# Altium PCB pix v2.4.8.PcbDoc (part 1 of 3)
Units mil, origin at the board's own origin, x right, y up, seen from the top; angles counter-clockwise.
Board outline 2756 x 1595 mil, 4 copper layers (Top, MidLayer1, MidLayer2, Bottom), stack 50.397 mil thick; 154 components, 289 nets, 731 pads, 438 vias.
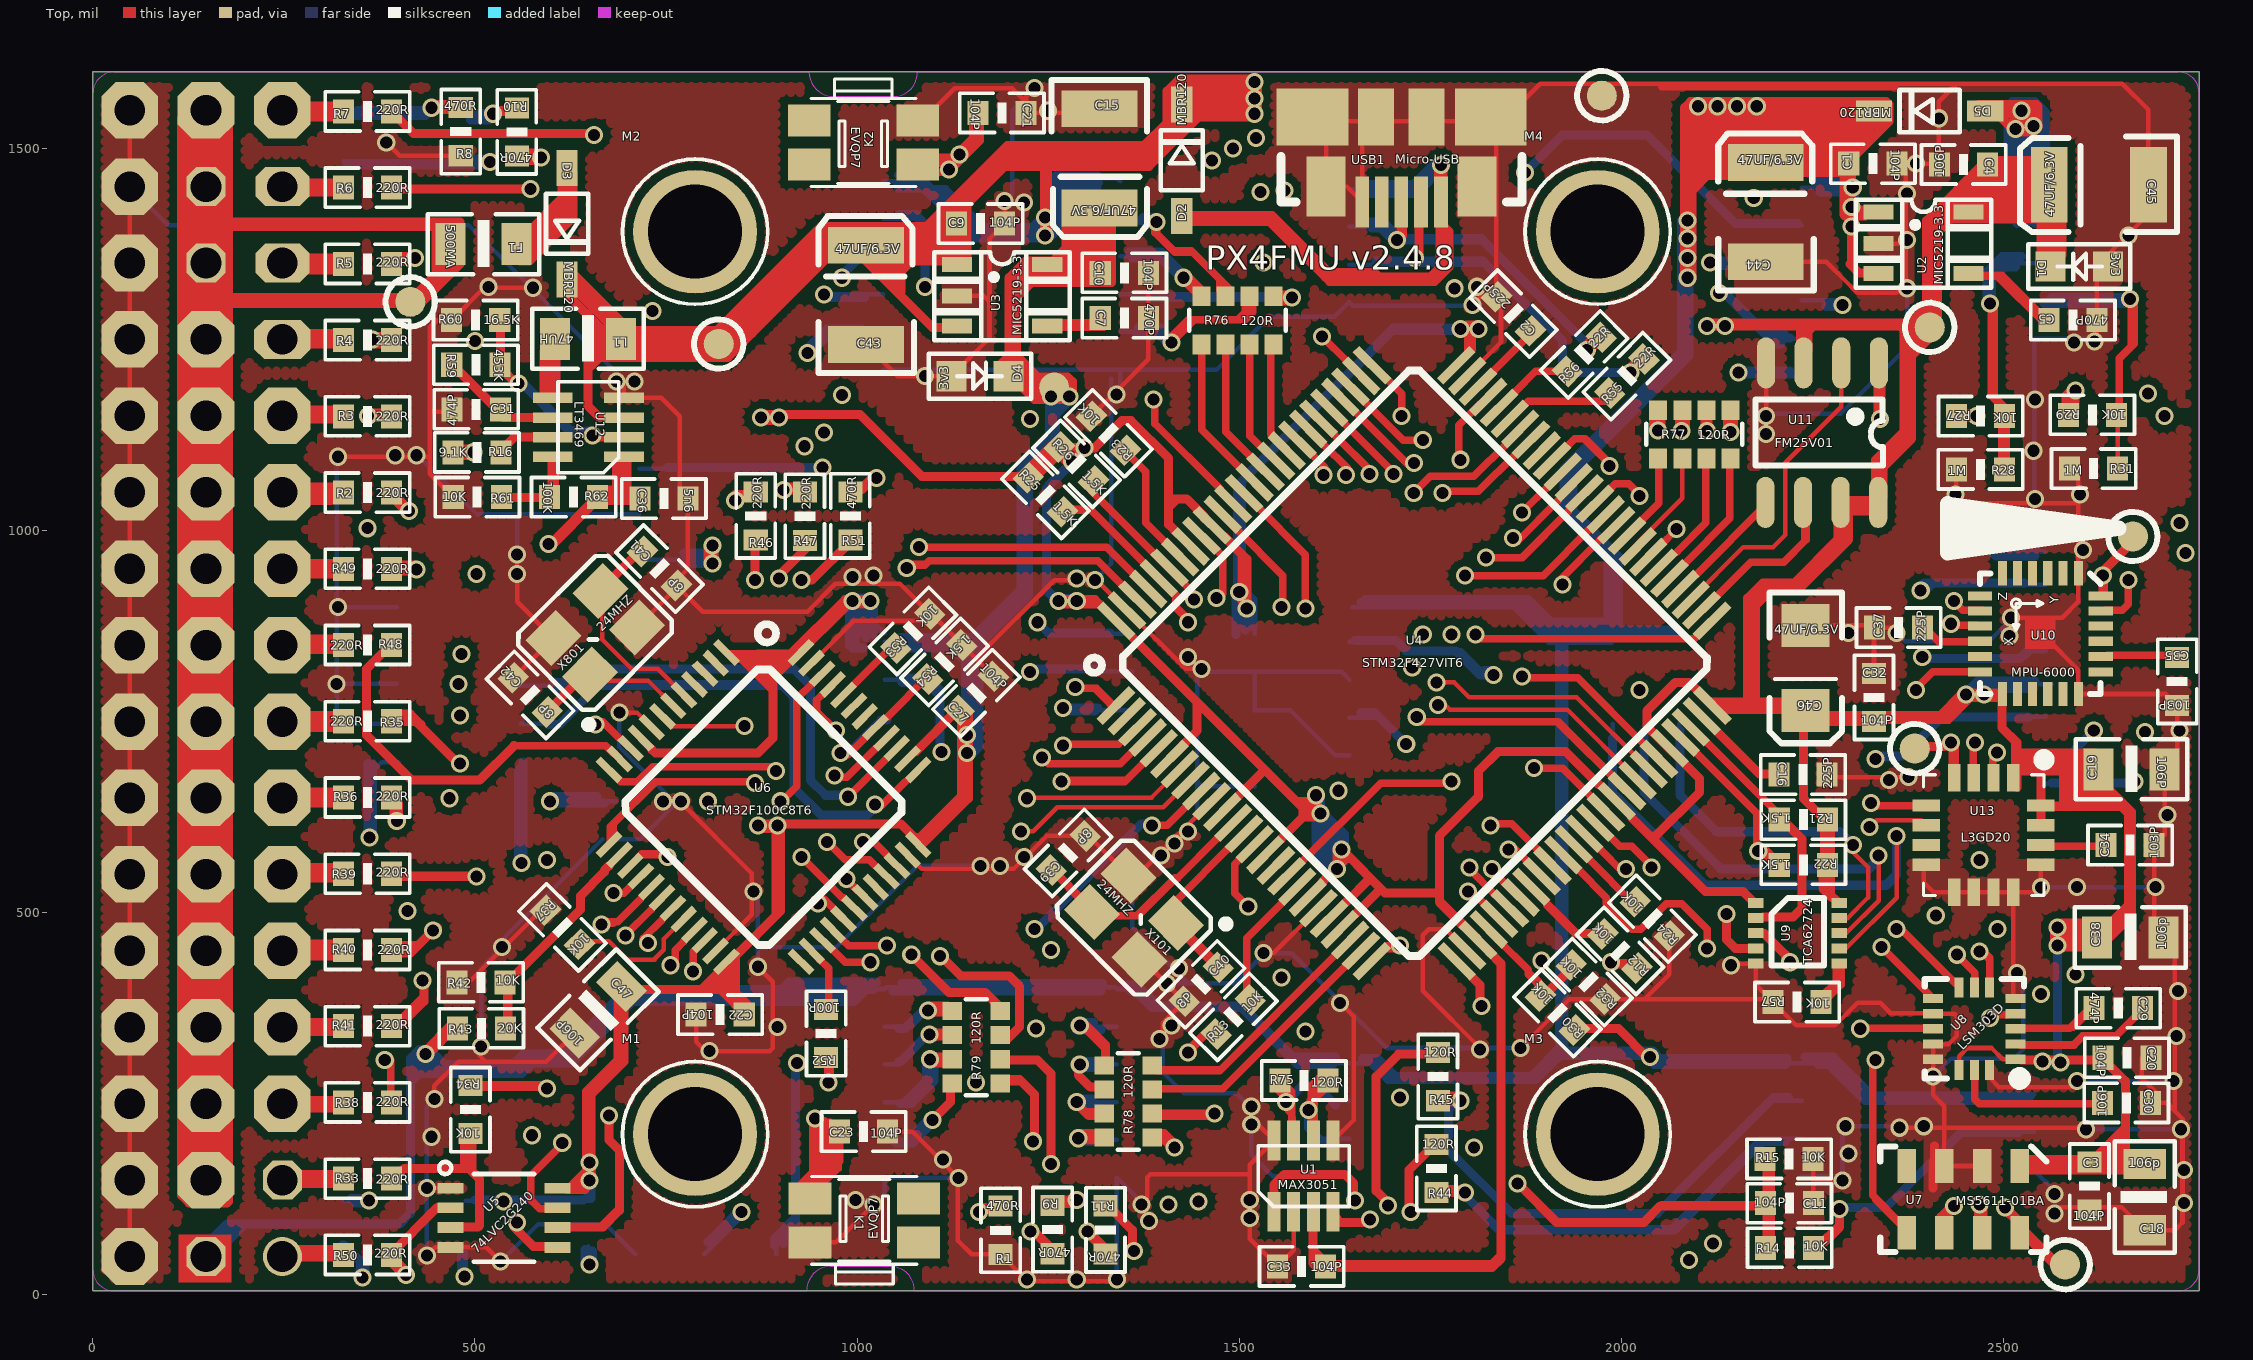
[diagram p0: Top view]
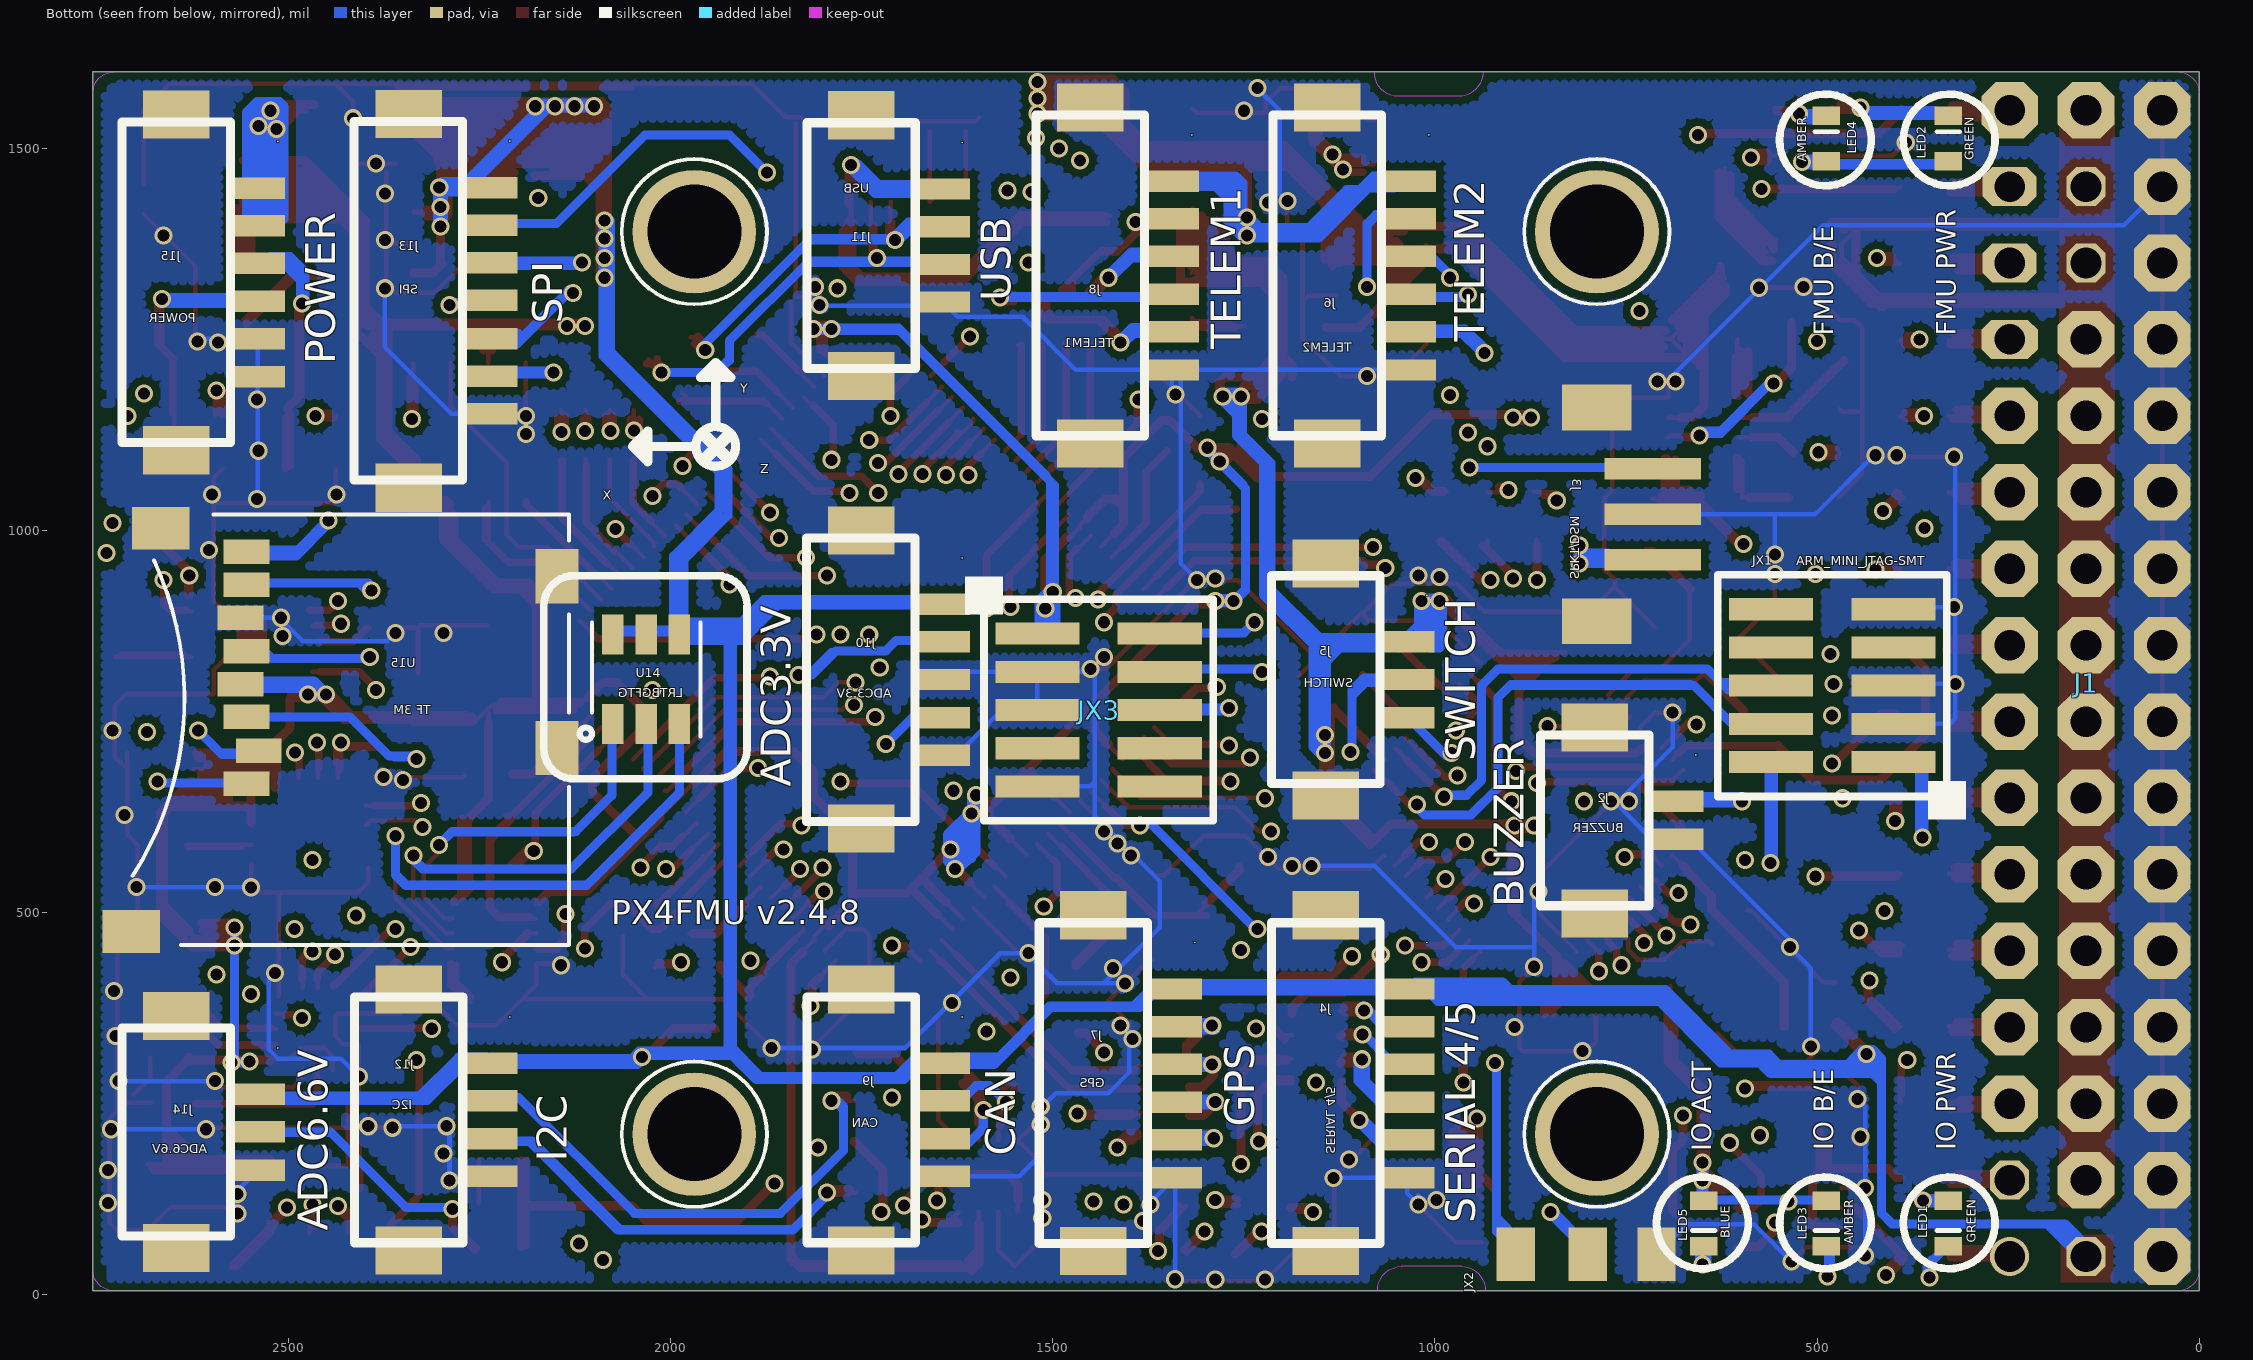
[diagram p1: Bottom view, seen from below]
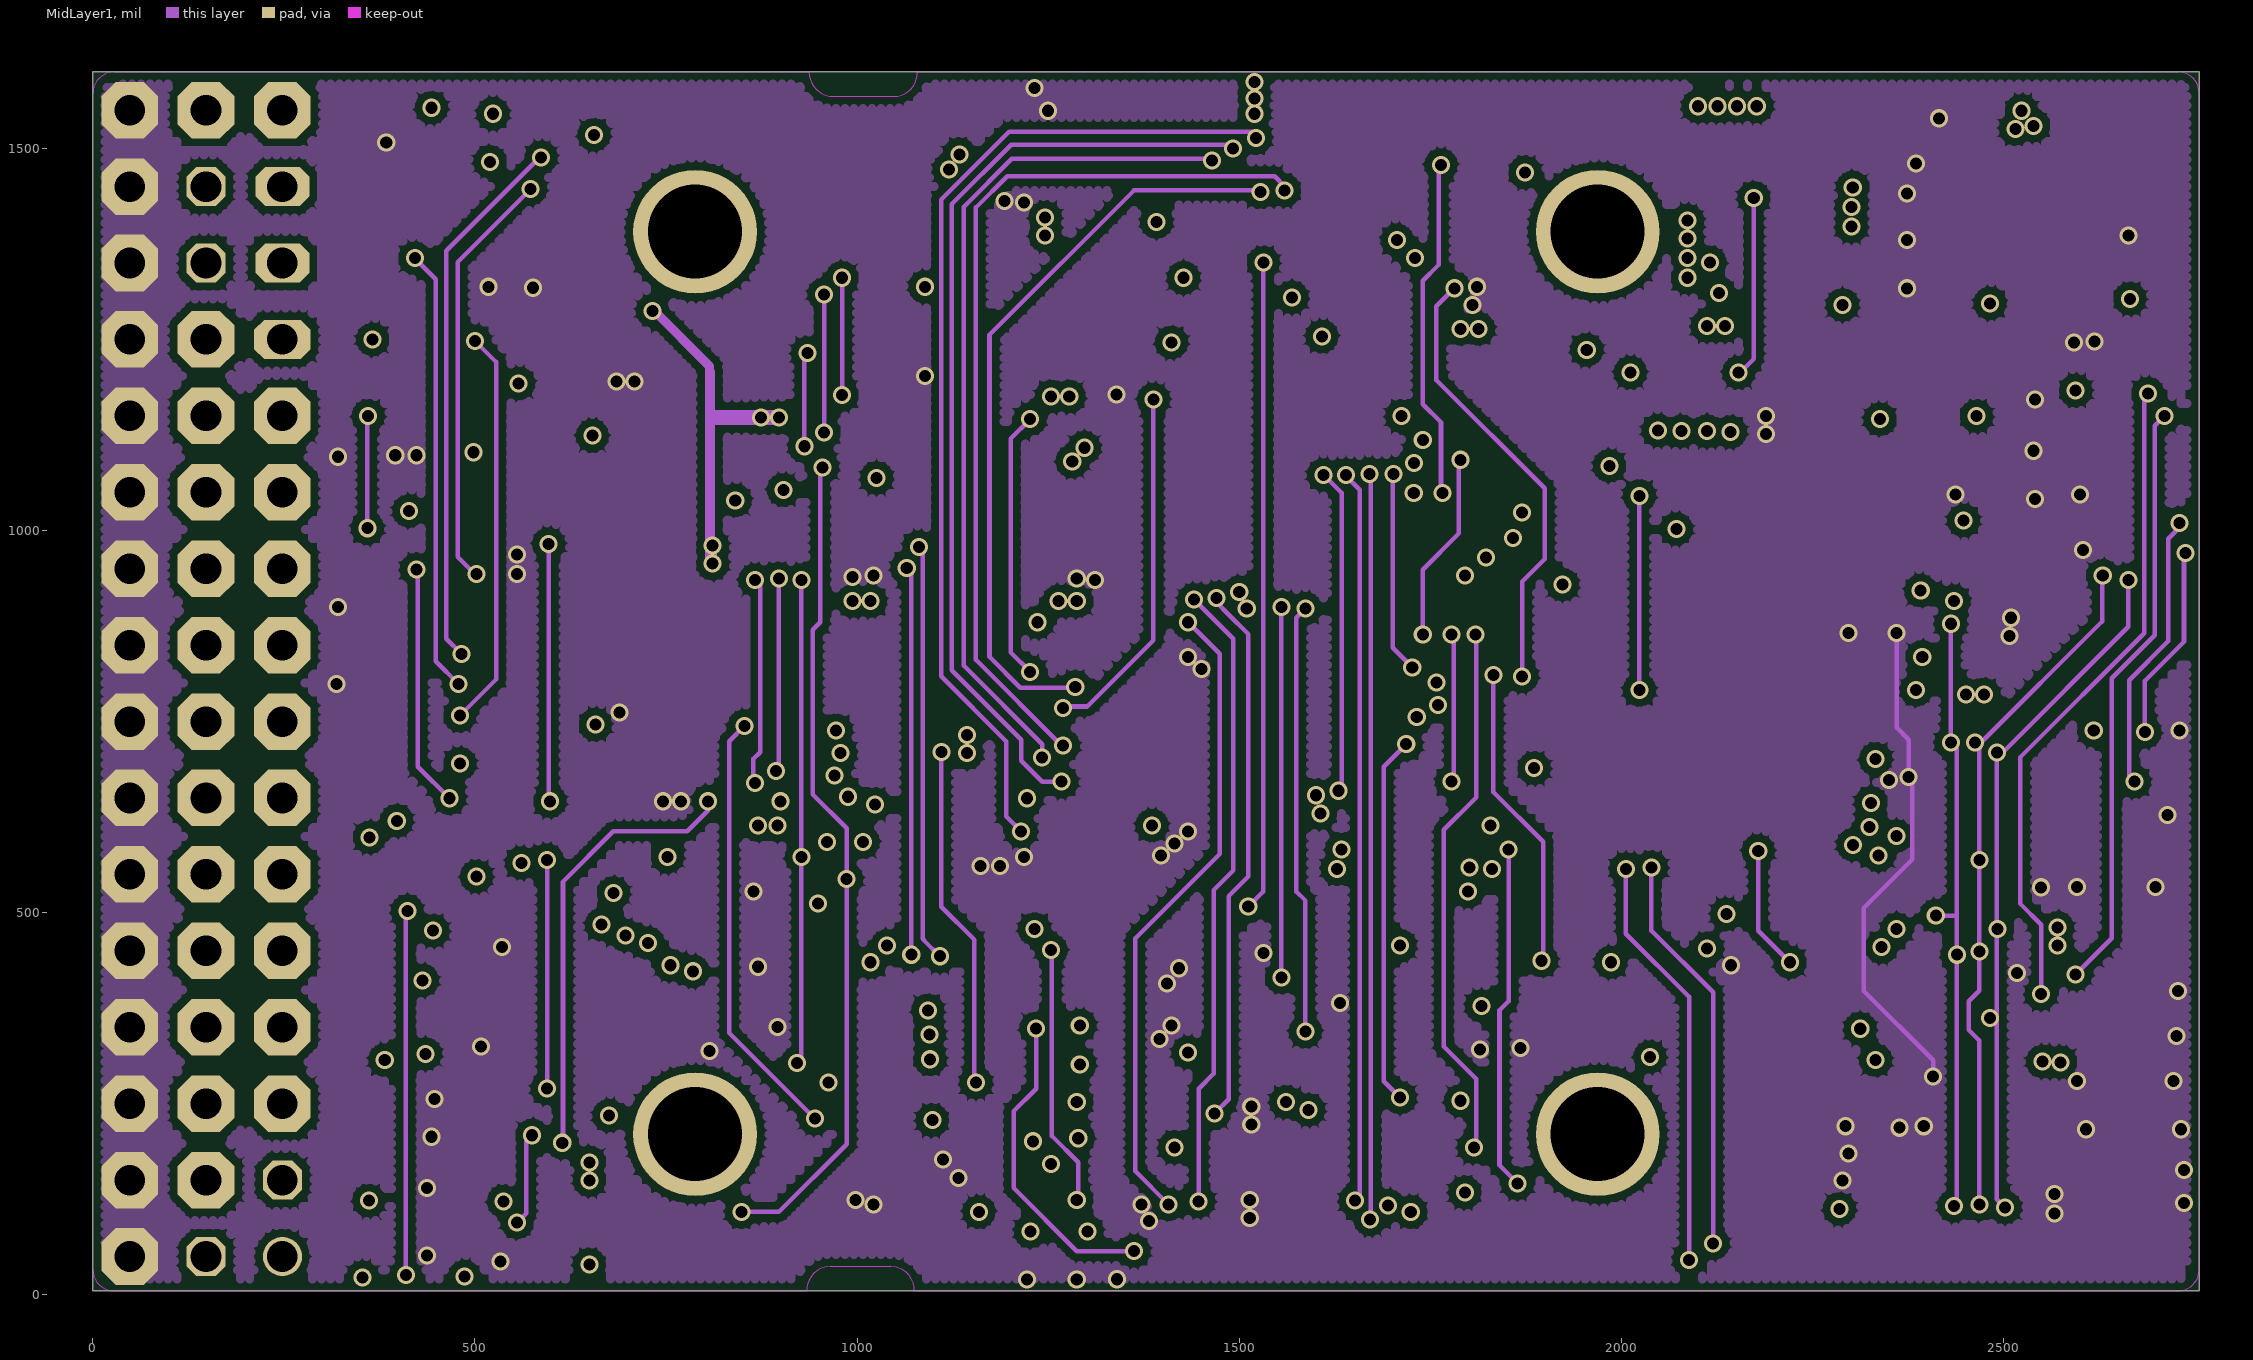
[diagram p2: MidLayer1]
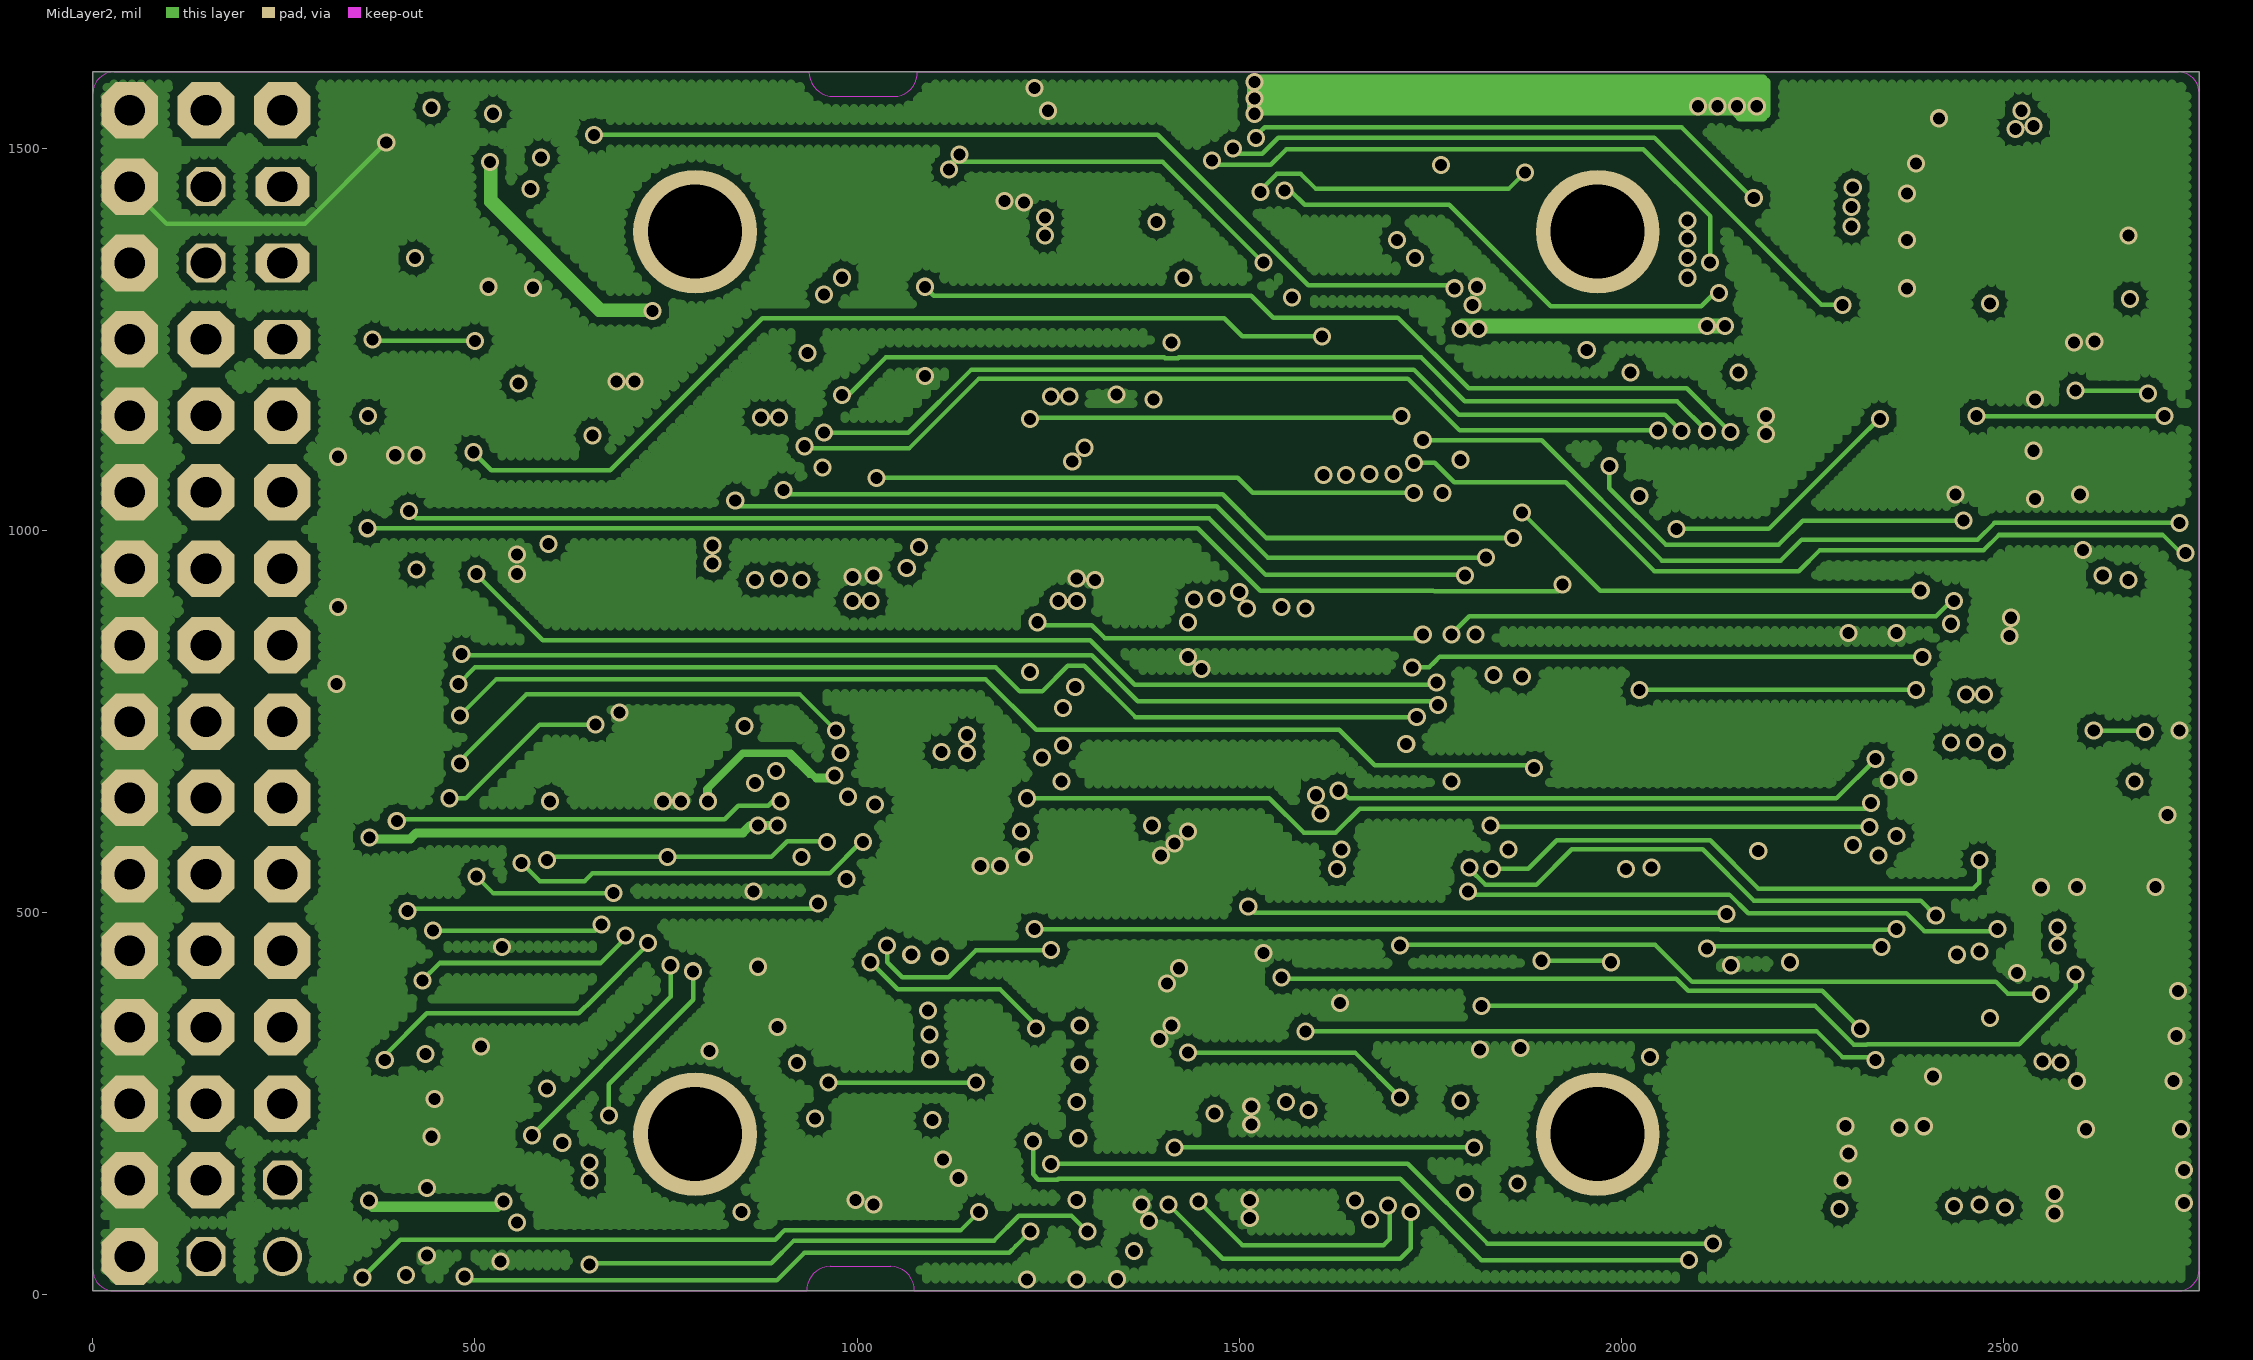
[diagram p3: MidLayer2]

## Layer stack, top to bottom
Top Solder: solder mask 0.4, Solder Resist, Dk 3.5
Top: signal copper 1.378
Dielectric1: core 19.685, FR-4, Dk 4.8
MidLayer1: signal copper 1.378
Dielectric2: prepreg 12.6, FR-4, Dk 4.8
MidLayer2: signal copper 1.378
Dielectric3: core 12.6, FR-4, Dk 4.8
Bottom: signal copper 1.378
Bottom Solder: solder mask 0.4, Solder Resist, Dk 3.5

## Board outline
0,5 2756,5 2756,1600 0,1600

## Design rules (kind name [scope] priority, off if disabled: settings)
Clearance [All] p1: gap=9.84 ignorepadtopadclearanceinfootprint=FALSE
FanoutControl Fanout_LCC [All] p1 off: bgadir=Out bgaviamode=Centered fanoutstyle=Auto fanoutdirection=Alternating viagrid=1 // Protel DXP Scope 1 Expression Was: IsLCC   Fanout_LCC (Default Rule)
FanoutControl Fanout_BGA [All] p2 off: bgadir=Out bgaviamode=Centered fanoutstyle=Auto fanoutdirection=Alternating viagrid=1 // Protel DXP Scope 1 Expression Was: IsBGA   Fanout_BGA (Default Rule)
FanoutControl Fanout_SOIC [All] p3 off: bgadir=Out bgaviamode=Centered fanoutstyle=Auto fanoutdirection=Alternating viagrid=1 // Protel DXP Scope 1 Expression Was: IsSOIC   Fanout_SOIC (Default Rule)
FanoutControl Fanout_Default [All] p4: bgadir=Out bgaviamode=Centered fanoutstyle=Auto fanoutdirection=Alternating viagrid=1 // Fanout_Default (Default Rule)
FanoutControl Fanout_Small [All] p5 off: bgadir=Out bgaviamode=Centered fanoutstyle=Auto fanoutdirection=Alternating viagrid=1 // Protel DXP Scope 1 Expression Was: (CompPinCount < 5)   Fanout_Small (Default Rule)
HoleSize [All] p1: absolutevalues=TRUE maxlimit=100000 minlimit=7.87 maxpercent=80.000 minpercent=20.000
PasteMaskExpansion [All] p1: expansion=1
PlaneConnect [All] p1: planeconnectstyle=NoConnect reliefexpansion=20 reliefentries=4 reliefconductorwidth=10 reliefairgap=10
PolygonConnect 多边形连接.... [All] p1: connectstyle=NoConnect reliefconductorwidth=10 reliefentries=4 polygonreliefangle="45 Angle" airgapwidth=10
RoutingLayers [All] p1: top layer_v5=FALSE mid layer 1_v5=FALSE mid layer 2_v5=FALSE bottom layer_v5=FALSE
RoutingVias [All] p1: holewidth=15.75 width=23.62 viastyle="Through Hole" minholewidth=15.75 minwidth=23.62 maxholewidth=15.75 maxwidth=23.62
SilkToSolderMaskClearance SilkscreenOverComponentPads [All] p1: minsilkscreentomaskgap=10 clearancetoexposedcopper=TRUE
SolderMaskExpansion [All] p1: expansion=1 istentingtop=FALSE
Width [All] p1: maxlimit=5.91 minlimit=5.91 preferedwidth=5.91
20 further rules are at their usual default settings.

## Components (designator, comment, footprint, x,y, rotation, side; value= is the part's Value field where it differs from the comment)
C1 "104P" 0603 2360.55,1479.92 r180 top
C2 "225P" 0603 1836.62,1305.96 r315 top
C3 "104P" 0603 2612.44,110.51 r90 top
C4 "106P" 0603 2416.3,1478.94 r0 top
C5 "470P" 0603 2559.33,1275.35 r0 top
C7 "470P" 0603 1318.11,1277.83 r0 top
C9 "104P" 0603 1130.04,1401.57 r0 top
C10 "104P" 0603 1318.11,1337.17 r0 top
C11 "104P" 0603 2251.34,119.8 r180 top
C15 "47UF/6.3V" C-3528 1318.62,1491.34 r90 top
C16 "225P" 0603 2269.19,680.53 r180 top
C18 "106p" 0805 2684.8,170.98 r270 top
C19 "106P" 0805 2710.75,687.48 r180 top
C20 "104P" 0603 2630.08,310.04 r0 top
C21 "104P" 0603 1220.98,1546.42 r180 top
C22 "104P" 0603 789.29,366.53 r0 top
C23 "104P" 0603 1039.96,213.5 r180 top
C27 "104P" 0603 1133.81,764.77 r45 top
C29 "474P" 0603 2618.7,374.92 r0 top
C30 "106P" 0603 2629.33,251.06 r0 top
C31 "474P" 0603 470.12,1158.54 r0 top
C32 "104P" 0603 2330.59,813 r270 top
C33 "104P" 0603 1550.12,37.05 r0 top
C34 "103P" 0603 2697.17,588.31 r180 top
C35 "103P" 0603 2727.28,771.06 r90 top
C36 "5n6" 0603 778.62,1041.69 r180 top
C37 "225P" 0603 2394.29,872.95 r180 top
C38 "106p" 0805 2709.25,467.44 r180 top
C39 "8P" 0603 1253.91,555.78 r45 top
C40 "8P" 0603 1472.47,428.47 r225 top
C41 "8P" 0603 719.16,972.47 r315 top
C42 "8P" 0603 549.87,807.12 r315 top
C43 "47UF/6.3V" C-3528 1010.12,1303.94 r270 top
C44 "47UF/6.3V" C-3528 2187.28,1412.2 r270 top
C45 "47UF/6.3V" C-3528 2629.13,1451.06 r0 top
C46 "47UF/6.3V" C-3216 2240.95,808.78 r180 top
C47 "106P" 0805 630.47,342.26 r45 top
D1 "3v3" SOD-323 2603.11,1347.4 r0 top
D2 "MBR120" SOD-123 1426.57,1486.3 r90 top
D3 "MBR120" SOD-123 618.7,1399.53 r270 top
D4 "3v3" SOD-323 1156.73,1199.88 r180 top
D5 "MBR120" SOD-123 2401.5,1550.59 r180 top
F1 "500MA" 0805D 511.22,1374.65 r180 top
J1 "" 3X16RA 148,800 r0 bottom locked
J2 "BUZZER" DF13C-2P-1.25V 720,621 r270 bottom locked
J3 "SPKT/DSM" JST-ZH-SMT-VERTICAL 784,1021 r90 bottom locked
J4 "SERIAL 4/5" DF13C-6P-1.25V 1072,277 r270 bottom locked
J5 "SWITCH" DF13C-3P-1.25V 1072,805 r270 bottom locked
J6 "TELEM2" DF13C-6P-1.25V 1070,1334 r270 bottom locked
J7 "GPS" DF13C-6P-1.25V 1376,277 r270 bottom locked
J8 "TELEM1" DF13C-6P-1.25V 1380,1334 r270 bottom locked
J9 "CAN" DF13C-4P-1.25V 1680,229 r270 bottom locked
J10 "ADC3.3V" DF13C-5P-1.25V 1680,805 r270 bottom locked
J11 "USB" DF13C-4P-1.25V 1680,1373 r270 bottom locked
J12 "I2C" DF13C-4P-1.25V 2272,229 r270 bottom locked
J13 "SPI" DF13C-7P-1.25V 2272,1301 r270 bottom locked
J14 "ADC6.6V" DF13C-3P-1.25V 2576,213 r270 bottom locked
J15 "POWER" DF13C-6P-1.25V 2576,1325 r270 bottom locked
JX1 "ARM_MINI_JTAG-SMT" FTSH-105-01-XXX-DV-K 480,797 r90 bottom locked
JX2 "" HEADER_3X01_SMD_H_BOARD_EDGE_SHORT 800,53 r180 bottom locked
JX3 "ARM_MINI_JTAG-SMT" FTSH-105-01-XXX-DV-K 1440,765 r270 bottom locked
K1 "EVQP7" EVQP7J01K 1007.13,101.97 r180 top locked
K2 "EVQP7" EVQP7J01K 1010.5,1503.03 r0 top locked
L1 "47UH" 0805D 647.91,1250.75 r180 top
LED1 "GREEN" 0603-LED 328,93 r90 bottom locked
LED2 "GREEN" 0603-LED 328,1513 r270 bottom locked
LED3 "AMBER" 0603-LED 488,93 r90 bottom locked
LED4 "AMBER" 0603-LED 488,1513 r270 bottom locked
LED5 "BLUE" 0603-LED 648,93 r90 bottom locked
M1 "" MOUNT-HOLE3.1 788,210 r0 top locked
M2 "" MOUNT-HOLE3.1 788,1391 r0 top locked
M3 "" MOUNT-HOLE3.1 1969,210 r0 top locked
M4 "" MOUNT-HOLE3.1 1969,1391 r0 top locked
R1 "470R" 0603 1187.72,115.87 r270 top
R2 "220R" 0603 390.83,1049.62 r180 top
R3 "220R" 0603 390.83,1149.37 r180 top
R4 "220R" 0603 390.83,1249.13 r180 top
R5 "220R" 0603 390.83,1348.88 r180 top
R6 "220R" 0603 390.83,1448.63 r180 top
R7 "220R" 0603 390.83,1548.38 r180 top
R8 "470R" 0603 481.38,1553.31 r270 top
R9 "470R" 0603 1255.75,53.58 r90 top
R10 "470R" 0603 554.72,1490.04 r90 top
R11 "470R" 0603 1325.04,53.43 r90 top
R12 "10K" 0603 1975.96,472.07 r315 top
R13 "10K" 0603 1514.58,385.75 r225 top
R14 "10K" 0603 2251.65,61.35 r180 top
R15 "10K" 0603 2250.9,177.73 r180 top
R16 "9.1K" 0603 470.94,1102.24 r0 top
R21 "1.5K" 0603 2206.57,621.57 r0 top
R22 "1.5K" 0603 2206.57,562.52 r0 top
R23 "10K" 0603 1306.56,1149.49 r315 top
R24 "10K" 0603 2062.78,469.7 r135 top
R25 "1.5K" 0603 1268.66,1024.34 r135 top
R26 "1.5K" 0603 1309.42,1064.76 r135 top
R27 "10K" 0603 2438.5,1149.72 r0 top
R28 "1M" 0603 2501.46,1080 r180 top
R29 "10K" 0603 2584.92,1151.34 r0 top
R30 "10K" 0603 1894.07,390.86 r315 top
R31 "1M" 0603 2649.33,1080.95 r180 top
R32 "10K" 0603 1934.5,431.43 r315 top
R33 "220R" 0603 390.83,151.84 r180 top
R34 "10K" 0603 493.98,273.74 r270 top
R35 "220R" 0603 390.83,750.36 r180 top
R36 "220R" 0603 390.83,650.61 r180 top
R37 "10K" 0603 592.12,503.05 r315 top
R38 "220R" 0603 390.83,251.59 r180 top
R39 "220R" 0603 390.83,550.85 r180 top
R40 "220R" 0603 390.83,451.1 r180 top
R41 "220R" 0603 390.83,351.35 r180 top
R42 "10K" 0603 539.34,408.75 r180 top
R43 "20K" 0603 476.82,348.62 r0 top
R44 "120R" 0603 1757.99,133.74 r90 top
R45 "120R" 0603 1759.96,253.82 r90 top
R46 "220R" 0603 867.38,1050.61 r270 top
R47 "220R" 0603 931.69,1050.12 r270 top
R48 "220R" 0603 390.83,850.11 r180 top
R49 "220R" 0603 390.83,949.87 r180 top
R50 "220R" 0603 390.83,52.09 r180 top
R51 "470R" 0603 991.06,1050.59 r270 top
R52 "100R" 0603 959.49,373.3 r270 top
R53 "10K" 0603 1050.66,846.29 r45 top
R54 "1.5K" 0603 1092.24,805.67 r45 top
R55 "22R" 0603 1984.98,1179.83 r45 top
R56 "22R" 0603 1929.11,1208.15 r45 top
R57 "10K" 0603 2261.46,382.95 r180 top
R59 "453K" 0603 469.57,1216.89 r0 top
R60 "16.5K" 0603 532.4,1275.24 r180 top
R61 "10K" 0603 471.54,1043.66 r0 top
R62 "100K" 0603 597.52,1043.66 r0 top
R75 "120R" 0603 1616.18,280.28 r180 top
R76 "120R" TC164 1497.66,1274.88 r0 top
R77 "120R" TC164 2095.48,1125.66 r0 top
R78 "120R" TC164 1354.66,252.96 r90 top
R79 "120R" TC164 1155.84,323.83 r90 top
U1 "MAX3051" SOT23-8#1 1584,154.91 r0 top
U2 "MIC5219-3.3" SOT-23-5 2396.66,1374.9 r0 top
U3 "MIC5219-3.3" SOT-23-5 1191.03,1306.39 r0 top
U4 "STM32F427VIT6" TQFP100 1728.93,826 r45 top locked
U5 "74LVC2G240" TSSOP8_SOT505-2 537.76,100.91 r270 top
U6 "STM32F100C8T6" TQFP48 877.68,638.54 r225 top locked
U7 "MS5611-01BA" MS5611-01BA 2447.09,125.12 r270 top
U8 "LSM303D" LGA-16L 2461.93,348.03 r180 top
U9 "TCA62724" SON10 2233.74,464.25 r180 top
U10 "MPU-6000" QFN-24 2548.01,865.04 r270 top
U11 "FM25V01" sop-8-2 2258.31,1127.46 r270 top
U12 "LT3469" SOT23-8#2 644.72,1137.83 r180 top
U13 "L3GD20" L3G4200DH-MAN 2473.9,601.61 r270 top
U14 "LRTBGFTG" 6-PLCC 2032,805 r90 bottom locked
U15 "TF 3M" MICROSD 2448,745 r90 bottom locked
USB1 "Micro-USB" MOLEX-47346-0001 1712,1541 r270 top locked
X101 "24MHZ" OSCILLATOR-3.2X2.5 1362.7,493.52 r135 top
X801 "24MHZ" OSCILLATOR-3.2X2.5 657.21,865.72 r45 top
? "" OSHW-LOGO-S 2112.64,291.77 r0 top

## Footprints (in the part's own frame and the unit in brackets; to place one, negate y for a bottom-side part, rotate by r counter-clockwise, add the part's x,y. Pads: shape width x height; smd on the part's side, far side on the other; paste and mask are expansions set on the pad)
3X16RA [mil]
  round 51.18 hole 40: 1(100,750)
  oct 51.18x51.18 hole 40: 2(0,750) 4(100,650) 41(0,-550) 44(0,-650)
  oct 74x74 hole 40: 3(-100,750) 5(0,650) 6(-100,650) 7(100,550) 8(0,550) 9(-100,550) 10(100,450) 11(0,450) 12(-100,450) 13(100,350) 14(0,350) 15(-100,350) 16(100,250) 17(0,250) 18(-100,250) 19(100,150) 20(0,150) 21(-100,150) 22(100,50) 23(0,50) 24(-100,50) 25(100,-50) 26(0,-50) 27(-100,-50) 28(100,-150) 29(0,-150) 30(-100,-150) 31(100,-250) 32(0,-250) 33(-100,-250) 34(100,-350) 35(0,-350) 36(-100,-350) 38(0,-450) 39(-100,-450) 42(-100,-550) 45(-100,-650) 46(100,-750) 47(0,-750) 48(-100,-750)
  oct 74x51.18 hole 40: 37(100,-450)
  oct 70.87x51.18 hole 40: 40(100,-550) 43(100,-650)
6-PLCC [mil]
  rect 52x28 smd: A1(59,44) A2(59,0) A3(59,-43.31) C1(-58.07,44) C2(-58.07,0) C3(-58.07,-43.31)
  silkscreen extent -79,-71 75,87
0603 [mm]
  rect 0.7x0.8 smd: 1(0,0) 2(1.6,0)
  silkscreen extent -0.6,-0.65 2.2,0.65
0603-LED [mil]
  rect 24x36 smd: A(30,0) C(-29.53,0)
  silkscreen extent -9,-15 -9,15
0805 [mm]
  rect 1x1.4 smd: 1(0,0) 2(2.2,0)
  silkscreen extent -0.75,-1 2.95,1
0805D [mm]
  rect 1x1.4 smd: 1(-1.1,0) 2(1.1,0)
  silkscreen extent -1.85,-1 1.85,1
C-3216 [mil]
  rect 63x56 smd: 1(0,44.19) 2(0,-66.93)
  silkscreen extent -48,-110 47,87
C-3528 [mil]
  rect 48x99 smd: 1(-69.41,1.5) 2(60.55,1.5)
  silkscreen extent -107,-61 98,64
DF13C-2P-1.25V [mil]
  rect 28x71 smd: 1(-24.61,36) 2(25,36)
  rect 63x87 smd: M$0(122,-70.87) M$1(-121.06,-70.87)
  silkscreen extent -111,-142 112,0
DF13C-3P-1.25V [mil]
  rect 28x71 smd: 1(-49.21,36) 2(0,36) 3(50,36)
  rect 63x87 smd: M$0(152,-70.87) M$1(-151.57,-70.87)
  silkscreen extent -136,-142 136,0
DF13C-4P-1.25V [mil]
  rect 28x71 smd: 1(-73.82,36) 2(-24.61,36) 3(25,36) 4(74,36)
  rect 63x87 smd: M$0(171,-70.87) M$1(-170.28,-70.87)
  silkscreen extent -160,-142 161,0
DF13C-5P-1.25V [mil]
  rect 28x71 smd: 1(-98.43,36) 2(-49.21,36) 3(0,36) 4(50,36) 5(99,36)
  rect 63x87 smd: M$0(195,-70.87) M$1(-194.88,-70.87)
  silkscreen extent -185,-142 186,0
DF13C-6P-1.25V [mil]
  rect 28x71 smd: 1(-123.03,36) 2(-73.82,36) 3(-24.61,36) 4(25,36) 5(74,36) 6(124,36)
  rect 63x87 smd: M$0(220,-70.87) M$1(-219.49,-70.87)
  silkscreen extent -210,-142 210,0
DF13C-7P-1.25V [mil]
  rect 28x71 smd: 1(-147.64,36) 2(-98.43,36) 3(-49.21,36) 4(0,36) 5(50,36) 6(99,36) 7(148,36)
  rect 63x87 smd: M$0(245,-70.87) M$1(-244.09,-70.87)
  silkscreen extent -234,-142 235,0
EVQP7J01K [mil]
  rect 56x42 smd: 1(-73.13,33.59) 2(-73.13,-23.95) 3(68.73,-23.95) 7(68.73,33.59)
  silkscreen extent -71,-53 67,88
FTSH-105-01-XXX-DV-K [mil]
  rect 29x110 smd: 1(-100,-80) 2(-100,80) 3(-50,-80) 4(-50,80) 5(0,-80) 6(0,80) 7(50,-80) 8(50,80) 9(100,-80) 10(100,80)
  silkscreen extent -175,-175 145,150
HEADER_3X01_SMD_H_BOARD_EDGE_SHORT [mil]
  rect 50x70 smd: 1(-94.09,0) 2(0,0) 3(90.16,0)
JST-ZH-SMT-VERTICAL [mil]
  rect 28x126 smd: P$1(-59.06,-68.9) P$2(0,-68.9) P$3(60,-68.9)
  rect 60x91 smd: P$4(140,4) P$5(-139.76,4)
L3G4200DH-MAN [mil]
  rect 36x16 smd: 1(-74.8,39) 2(-74.8,13) 3(-74.8,-12.8) 4(-74.8,-38.39) 9(75,-38.39) 10(75,-12.8) 11(75,13) 12(75,39)
  rect 16x36 smd: 5(-38.39,-74.8) 6(-12.8,-74.8) 7(13,-74.8) 8(39,-74.8) 13(39,75) 14(13,75) 15(-12.8,75) 16(-38.39,75)
  silkscreen extent -102,-79 79,83
LGA-16L [mil]
  rect 26x12 smd: 1(-53.94,40) 2(-53.94,20) 3(-53.94,0) 4(-53.94,-19.68) 5(-53.94,-39.37) 9(54,-39.37) 10(54,-19.68) 11(54,0) 12(54,20) 13(54,40)
  rect 12x26 smd: 6(-19.68,-53.94) 7(0,-53.94) 8(20,-53.94) 14(20,54) 15(0,54) 16(-19.68,54)
  silkscreen extent -65,-65 65,70
MICROSD [mil]
  rect 32x60 smd: 1(-76.38,107) 2(-33.07,91) 3(11,107) 4(54,115) 5(97,107) 6(141,115) 7(184,107) 8(227,107)
  rect 56x75 smd: NC(-269.68,258) NC3(258,219)
  rect 71x56 smd: NC1(-29.53,-299.21) NC2(195,-299.21)
  silkscreen extent -287,-315 276,256
MOLEX-47346-0001 [mil]
  rect 67x18 smd: D+(111,0) D-(111,26) GND(111,-51.18) ID(111,-25.59) VBUS(111,52)
  rect 75x94 smd: ""(0,117) ""(0,-116.14)
  rect 75x47 smd: ""(0,33) ""(0,-32.97)
  rect 78.74x51.18 smd: ""(91,99) ""(91,-98.43)
  silkscreen extent 52,-157 111,158
MOUNT-HOLE3.1 [mil]
  round 162 hole 123: P$1(0,0)
  silkscreen extent -95,-95 95,95
MS5611-01BA [mil]
  rect 44x24 smd: 1(-43.31,74) 2(-43.31,25) 3(-43.31,-24.61) 4(-43.31,-73.82) 5(44,-73.82) 6(44,-24.61) 7(44,25) 8(44,74)
  silkscreen extent -69,-108 69,109
OSCILLATOR-3.2X2.5 [mil]
  rect 56x48 smd: 1(-43.31,-33.46) 2(44,-33.46) 3(44,34) 4(-43.31,34)
  silkscreen extent -95,-83 83,71
OSHW-LOGO-S [mil]
QFN-24 [mil]
  rect 32x12 smd: 1(-78.74,50) 2(-78.74,30) 3(-78.74,10) 4(-78.74,-9.84) 5(-78.74,-29.53) 6(-78.74,-49.21) 13(79,-49.21) 14(79,-29.53) 15(79,-9.84) 16(79,10) 17(79,30) 18(79,50)
  rect 12x32 smd: 7(-49.21,-78.74) 8(-29.53,-78.74) 9(-9.84,-78.74) 10(10,-78.74) 11(30,-78.74) 12(50,-78.74) 19(50,79) 20(30,79) 21(10,79) 22(-9.84,79) 23(-29.53,79) 24(-49.21,79)
  Top region: -19.62,-19.65 20.06,-19.65 20.06,20.04 -19.62,20.04
  silkscreen extent -79,-79 79,79
SOD-123 [mm]
  rect 1.2x0.7 smd: 1(-1.896,0.046) 2(1.804,0.046)
  silkscreen extent -1.05,-0.65 0.95,0.75
SOD-323 [mm]
  rect 1x1 smd: 1(0.85,-0.05) 2(-1.05,-0.05)
  silkscreen extent -1.8,-0.79 1.6,0.69
SON10 [mil]
  rect 20x13 smd: 1(57.85,-48.34) 2(57.85,-28.65) 3(57.85,-8.97) 4(57.85,11.03) 5(57.85,31.03) 6(-51.28,31.03) 7(-51.28,11.03) 8(-51.28,-8.97) 9(-51.28,-28.65) 10(-51.28,-48.34)
  silkscreen extent -31,-55 37,33
sop-8-2 [mm]
  oval 1.7x0.6 smd: 1(-2.334,1.997) 2(-2.334,0.747) 3(-2.334,-0.503) 4(-2.334,-1.753) 5(2.306,-1.773) 6(2.306,-0.523) 7(2.306,0.727) 8(2.306,1.977)
  silkscreen extent -1.12,-2.11 1.08,2.14
SOT23-8#1 [mil]
  rect 17x52 smd: 1(-38.39,-46.26) 2(-12.8,-46.26) 3(13,-46.26) 4(39,-46.26) 5(39,47) 6(13,47) 7(-12.8,47) 8(-38.39,47)
  silkscreen extent -59,-39 60,40
SOT23-8#2 [mil]
  rect 52x13.78 smd: 1(-50.23,41.51) 2(-50.23,15.92) 3(-50.23,-9.87) 4(-50.23,-35.87) 5(43.03,-35.87) 6(43.03,-9.87) 7(43.03,15.92) 8(43.03,41.51)
  silkscreen extent -43,-57 36,62
SOT-23-5 [mm]
  rect 1x0.5 smd: 1(-1.534,1.063) 2(-1.534,0.013) 3(-1.534,-0.987) 4(1.466,-0.987) 5(1.466,1.063)
  silkscreen extent -2.33,-1.46 2.22,1.46
TC164 [mm]
  rect 0.6x0.65 smd: 1(-1.2,-0.8) 2(-0.4,-0.8) 3(0.4,-0.8) 4(1.2,-0.8) 5(1.2,0.8) 6(0.4,0.8) 7(-0.4,0.8) 8(-1.2,0.8)
  silkscreen extent -1.6,-0.35 1.6,0.35
TQFP48 [mil]
  rect 10x40 smd: 1(-108.27,-177.17) 2(-88.58,-177.17) 3(-68.9,-177.17) 4(-49.21,-177.17) 5(-29.53,-177.17) 6(-9.84,-177.17) 7(10,-177.17) 8(30,-177.17) 9(50,-177.17) 10(69,-177.17) 11(89,-177.17) 12(109,-177.17) 25(109,178) 26(89,178) 27(69,178) 28(50,178) 29(30,178) 30(10,178) 31(-9.84,178) 32(-29.53,178) 33(-49.21,178) 34(-68.9,178) 35(-88.58,178) 36(-108.27,178)
  rect 40x10 smd: 13(178,-108.27) 14(178,-88.58) 15(178,-68.9) 16(178,-49.21) 17(178,-29.53) 18(178,-9.84) 19(178,10) 20(178,30) 21(178,50) 22(178,69) 23(178,89) 24(178,109) 37(-177.17,109) 38(-177.17,89) 39(-177.17,69) 40(-177.17,50) 41(-177.17,30) 42(-177.17,10) 43(-177.17,-9.84) 44(-177.17,-29.53) 45(-177.17,-49.21) 46(-177.17,-68.9) 47(-177.17,-88.58) 48(-177.17,-108.27)
  silkscreen extent -175,-169 133,133
TQFP100 [mil]
  rect 60x12 smd: 1(-314.96,237) 2(-314.96,217) 3(-314.96,197) 4(-314.96,178) 5(-314.96,158) 6(-314.96,138) 7(-314.96,119) 8(-314.96,99) 9(-314.96,79) 10(-314.96,60) 11(-314.96,40) 12(-314.96,20) 13(-314.96,0) 14(-314.96,-19.68) 15(-314.96,-39.37) 16(-314.96,-59.05) 17(-314.96,-78.74) 18(-314.96,-98.43) 19(-314.96,-118.11) 20(-314.96,-137.8) 21(-314.96,-157.48) 22(-314.96,-177.17) 23(-314.96,-196.85) 24(-314.96,-216.54) 25(-314.96,-236.22) 51(315,-236.22) 52(315,-216.54) 53(315,-196.85) 54(315,-177.17) 55(315,-157.48) 56(315,-137.8) 57(315,-118.11) 58(315,-98.43) 59(315,-78.74) 60(315,-59.05) 61(315,-39.37) 62(315,-19.68) 63(315,0) 64(315,20) 65(315,40) 66(315,60) 67(315,79) 68(315,99) 69(315,119) 70(315,138) 71(315,158) 72(315,178) 73(315,197) 74(315,217) 75(315,237)
  rect 12x60 smd: 26(-236.22,-314.96) 27(-216.54,-314.96) 28(-196.85,-314.96) 29(-177.17,-314.96) 30(-157.48,-314.96) 31(-137.8,-314.96) 32(-118.11,-314.96) 33(-98.43,-314.96) 34(-78.74,-314.96) 35(-59.06,-314.96) 36(-39.37,-314.96) 37(-19.69,-314.96) 38(0,-314.96) 39(20,-314.96) 40(40,-314.96) 41(60,-314.96) 42(79,-314.96) 43(99,-314.96) 44(119,-314.96) 45(138,-314.96) 46(158,-314.96) 47(178,-314.96) 48(197,-314.96) 49(217,-314.96) 50(237,-314.96) 76(237,315) 77(217,315) 78(197,315) 79(178,315) 80(158,315) 81(138,315) 82(119,315) 83(99,315) 84(79,315) 85(60,315) 86(40,315) 87(20,315) 88(0,315) 89(-19.69,315) 90(-39.37,315) 91(-59.06,315) 92(-78.74,315) 93(-98.43,315) 94(-118.11,315) 95(-137.8,315) 96(-157.48,315) 97(-177.17,315) 98(-196.85,315) 99(-216.54,315) 100(-236.22,315)
  silkscreen extent -308,-276 276,304
TSSOP8_SOT505-2 [mil]
  rect 14x34 smd: 1(-38.39,-69.88) 2(-12.8,-69.88) 3(13,-69.88) 4(39,-69.88) 5(39,70) 6(13,70) 7(-12.8,70) 8(-38.39,70)
  silkscreen extent -73,-85 58,40

## Free pads (board coordinates)
  round 39.37 smd: 0(415.35,1299.21) 0(818.9,1244.09) 0(1257.87,1187.01) 0(1974.41,1568.9) 0(2383.86,714.57) 0(2403.54,1265.75) 0(2580.71,39.37) 0(2669.29,992.13)

## Via types
v1: diameter 23.62, hole 15.75, Top to Bottom, 438 vias

## Nets (pads, with @x,y where several pads share a name; then routed paths per layer and width w, separated by ;. In a path a pad name is that pad's centre, name@x,y a point inside that pad or via, vN(x,y) a via of type N, cw(c..) or ccw(c..) an arc to the next point about the centre after c; other vN are vias at no path point)
1: 
2: 
3: 
!ACCEL_MAG_CS: U4.9 U8.8 | length 1907.4
  Top w5.91: v1(1385.83,614.17) 1405.38,614.17 U4.9@1450.36,659.15 ; v1(2360.24,478.35) 2365.55,478.35 U8.8@2441.93,401.97
  Top w9.84: v1@1387.8,614.17 1405.51,614.17 U4.9@1431.1,639.76 ; v1@2364.17,480.32 2438.98,405.51 U8.8@2440.94,405.51
  MidLayer2 w5.91: v1(1232.28,478.35) 1255.9,478.35 1509.84,478.35 1726.37,478.35 1899.6,478.35 1905.51,478.35 2128.25,478.35 2129.23,477.36 2359.25,477.36 v1(2360.24,478.35)
  Bottom w5.91: v1(1232.28,478.35) 1368.11,614.17 v1(1385.83,614.17)
  Bottom w11.81: v1@1234.25,478.35 1372.05,616.14 v1@1387.8,616.14
!BARO_CS: U4.88 U7.5 | length 2145.3
  Top w5.91: U4.88@1506.19,1048.74 1586.61,968.32 v1(1586.61,897.64) ; v1@2330.71,309.06 2330.71,123.68 U7.5@2373.27,81.12
  Top w9.84: U4.88@1521.65,1033.46 1586.61,968.5 v1@1586.61,899.61 ; v1@2328.74,307.09 2328.74,129.92 U7.5@2366.14,92.52
  MidLayer1 w5.91: v1(1586.61,344.49) 1586.61,515.75 1574.8,527.56 1574.8,748.03 1574.8,885.83 v1(1586.61,897.64)
  MidLayer2 w5.91: v1(1586.61,344.49) 2255.91,344.49 2289.37,311.02 2328.74,311.02 v1(2332.67,307.09)
!FMU-LED_AMBER: R10.1 U4.43 | length 2386.8
  Top w5.91: R10.1@554.72,1490.04 584.76,1490.04 v1(586.61,1488.19) ; v1(1759.84,771.65) 1759.84,773.62 1767.72,773.62 1775.59,765.75 1929.19,765.75 U4.43@2021.65,673.29
  Top w11.81: R10.1@564.96,1484.25 v1@582.68,1484.25 ; R10.1@564.96,1494.09 v1@580.71,1494.09
  MidLayer1 w5.91: v1(482.28,838.58) 462.6,858.27 462.6,1365.84 584.94,1488.19 v1(586.61,1488.19)
  MidLayer2 w5.91: v1(482.28,838.58) 484.25,836.61 1291.34,836.61 1307.09,836.61 1367.13,776.57 1702.75,776.57 1714.56,776.57 1754.92,776.57 v1(1759.84,771.65)
!FRAM_CS: U4.57 U11.1 | length 573.7
  Top w5.91: U4.57@2035.19,965.22 v1(2071.93,1001.97) ; v1@2336.94,1147.31 U11.1@2336.94,1219.34
  Top w9.84: U4.57@2053.15,982.28 2068.9,998.03 v1@2068.9,1003.94 ; v1@2334.65,1151.57 U11.1@2334.65,1192.91 ; v1@2340.55,1147.64 U11.1@2340.55,1200.79
  MidLayer2 w5.91: v1(2071.93,1001.97) 2114.17,1001.97 2120.07,1001.97 2192.91,1001.97 2309.05,1118.11 2336.61,1145.67 v1(2338.58,1145.67)
  Bottom w5.91: v1(2071.93,1001.97) v1@2072.83,1001.97
!GYRO_CS: U4.7 U13.5 | length 1494
  Top w5.91: v1(1222.44,649.61) 1223.43,650.59 1385.23,650.59 U4.7@1422.08,687.43 ; v1(2326.77,643.7) 2326.77,639.77 2327.01,640 U13.5@2399.09,640
  Top w9.84: v1@2324.8,639.76 U13.5@2387.8,639.76
  MidLayer2 w5.91: v1(1222.44,649.61) 1539.37,649.61 1584.65,604.33 1625.98,604.33 1657.48,635.83 2318.89,635.83 v1(2326.77,643.7)
!IO-LED_AMBER: R9.2 U6.28 | length 806.7
  Top w5.91: U6.28@968.19,477.32 988.82,456.69 v1(1039.37,456.69) ; R9.2@1255.75,116.57 1279.96,116.57 v1(1287.4,124.02) v1@1287.4,125.98
  Top w9.84: U6.28@980.15,465.37 988.82,456.69 v1@1037.4,456.69
  Top w11.81: R9.2@1259.84,124.02 v1@1285.43,124.02
  MidLayer1 w5.91: v1@1254.92,449.8 1254.92,207.68 1289.37,173.23 1289.37,122.05 v1(1287.4,124.02)
  MidLayer2 w5.91: v1(1039.37,456.69) 1039.37,435.04 1059.06,415.35 1120.08,415.35 1155.51,450.79 v1(1253.94,450.79)
!IO-LED_BLUE: R11.2 U6.27 | length 936.5
  Top w5.91: U6.27@954.76,463.89 983.6,435.04 v1(1017.72,435.04) ; R11.2@1325.04,116.42 1362.2,79.25 v1(1362.2,57.09)
  Top w9.84: U6.27@968.5,450.79 984.25,435.04 v1@1015.75,435.04
  Top w11.81: R11.2@1334.65,116.14 1334.65,110.24 1360.24,84.65 v1@1360.24,61.02
  MidLayer1 w5.91: v1(1234.25,348.43) 1234.25,269.69 1204.72,240.16 1204.72,139.76 1287.4,57.09 v1(1362.2,57.09)
  MidLayer2 w5.91: v1(1017.72,435.04) 1053.15,399.61 1187.01,399.61 1234.25,352.36 v1(1234.25,348.43)
!IO-LED_SAFETY: R52.1 U6.26 | length 147.1
  Top w5.91: U6.26@940.61,449.75 962.9,427.46 962.9,376.71 R52.1@959.49,373.3
  Top w9.84: U6.26@950.79,438.98 962.6,427.17 R52.1@962.6,383.86
!MPU_CS: U4.17 U10.8 | length 1466.5
  Top w5.91: U4.17@1561.9,547.61 1685.55,671.26 v1(1777.56,671.26) ; v1(2435.04,907.48) 2447.95,894.57 U10.8@2469.27,894.57
  Top w9.84: U4.17@1576.77,561.02 1685.04,669.29 v1@1773.62,669.29 ; v1(2435.04,907.48) 2446.85,895.67 U10.8@2472.44,895.67
  MidLayer1 w5.91: v1(1777.56,671.26) 1779.53,669.29 v1@1779.53,674.21 ; v1(1777.56,864.17) 1780.51,864.17 v1@1780.51,674.21
  MidLayer2 w5.91: v1(1777.56,864.17) 1801.18,887.8 2411.71,887.8 2431.4,907.48 v1(2435.04,907.48)
!SBUS_OUTPUT_EN: U5.7 U6.40 | length 1430.3
  Top w5.91: U5.7@607.76,113.7 581.18,113.7 572.83,122.05 572.83,157.48 v1(614.17,198.82) ; v1@968.5,677.17 987.01,677.17 U6.40@1038.31,728.46
  Top w9.84: U5.7@602.36,112.2 584.65,112.2 572.83,124.02 572.83,155.51 v1@612.2,194.88 ; v1@968.5,677.17 986.22,677.17 1023.62,714.57
  MidLayer1 w5.91: v1@615.16,199.8 615.16,540.35 681.1,606.3 777.56,606.3 805.12,633.86 v1(805.12,645.67)
  MidLayer2 w5.91: v1@807.09,645.67 807.09,665.35 850.39,708.66 907.48,708.66 937.01,679.13 v1(970.47,679.13)
  MidLayer2 w9.84: v1@803.15,643.7 803.15,661.42 850.39,708.66 913.39,708.66 946.85,675.2 v1@972.44,675.2
!SPI_EXT_NSS: J13.5 U4.3 | length 2362.8
  Top w5.91: v1@1271.65,716.53 1277.54,722.42 1346.75,722.42 U4.3@1366.92,742.59
  Top w9.84: v1@1273.62,720.47 1342.52,720.47
  MidLayer1 w5.91: v1(1269.68,718.5) 1267.72,718.5 1155.51,830.71 1155.51,1422.7 1196.4,1463.58 1546.27,1463.58 1559.06,1450.8 v1(1559.06,1444.88)
  MidLayer2 w5.91: v1@1565.94,1444.88 1566.93,1444.88 1585.63,1426.18 1774.61,1426.18 1907.48,1293.31 2104.33,1293.31 2122.05,1311.02 v1(2127.95,1311.02)
  Bottom w5.91: v1(2127.95,1311.02) 2137.8,1311.02 2197.82,1251 J13.5@2236,1251
  Bottom w11.81: v1@2127.95,1316.93 2200.79,1244.09 J13.5@2208.66,1244.09 ; v1@2133.86,1314.96 2133.86,1312.99 2194.88,1251.97 J13.5@2220.47,1251.97 ; 2198.82,1257.87 J13.5@2212.6,1257.87
!VBUS_VALID: 
!VDD_5V_HIPOWER_OC: 
!VDD_5V_PERIPH_EN: U4.67
!VDD_5V_PERIPH_OC: 
!VDD_BRICK_VALID: 
!VDD_SERVO_VALID: 
AAA1: C7.1 U3.4 | length 176
  Top w5.91: U3.4@1248.74,1267.52 1307.8,1267.52 C7.1@1318.11,1277.83
  Top w9.84: U3.4@1261.81,1265.75 C7.1@1322.83,1265.75 ; 1269.68,1271.65 C7.1@1311.02,1271.65
AAA2: D3.1 F1.1 | length 653.2
  Top w5.91: F1.1@554.53,1374.65 620.51,1440.63 D3.1@620.51,1474.17
  Top w11.81: F1.1@557.09,1368.11 557.09,1372.05 620.08,1435.04 ; F1.1@557.09,1377.95 614.17,1435.04 D3.1@614.17,1464.57 ; F1.1@559.06,1352.36 570.87,1352.36 627.95,1409.45 D3.1@627.95,1468.5 ; F1.1@568.9,1364.17 572.83,1364.17 625.98,1417.32 ; F1.1@572.83,1372.05 620.08,1419.29 620.08,1444.88
AAA3: D5.1 J15.1 J15.2 | length 1545.7
  Top w5.91: D5.1@2476.14,1548.78 2523.19,1548.78 v1(2523.62,1549.21)
  Top w11.81: D5.1@2466.54,1557.09 2543.31,1557.09 2545.28,1555.12 2545.28,1527.56 2539.37,1521.65 2515.75,1521.65 D5.1@2490.16,1547.24 ; D5.1@2498.03,1545.28 2541.34,1545.28 ; v1@2509.84,1533.46 v1@2539.37,1533.46
  Bottom w5.91: v1(2523.62,1549.21) 2540,1532.83 J15.1@2540,1448.03 J15.2@2540,1398.82
  Bottom w11.81: J15.2@2505.91,1407.48 2505.91,1555.12 2511.81,1561.02 2541.34,1561.02 2555.12,1547.24 J15.2@2555.12,1399.61 ; J15.2@2517.72,1401.57 v1@2517.72,1551.18 ; J15.2@2523.62,1403.54 v1@2523.62,1557.09 ; J15.2@2533.46,1403.54 v1@2533.46,1551.18 ; J15.2@2541.34,1405.51 2541.34,1555.12 ; J15.2@2547.24,1407.48 2547.24,1547.24
  other v1: 2515.75,1525.59 2539.37,1529.53
ACCEL_DRDY: U4.90 U8.11 | length 1731.5
  Top w5.91: U4.90@1478.36,1020.9 1555.12,944.14 v1(1555.12,899.61) ; v1(2312.6,348.03) U8.11@2407.93,348.03
  Top w9.84: U4.90@1496.06,1001.97 1557.09,940.94 v1@1557.09,903.54 ; v1@2314.96,348.43 U8.11@2403.54,348.43
  MidLayer1 w5.91: v1(1555.12,415.35) 1555.12,462.6 1555.12,836.61 v1(1555.12,899.61)
  MidLayer2 w5.91: v1(1555.12,415.35) 1555.12,413.39 2062.99,413.39 2071.88,413.39 2087.63,397.64 2262.99,397.64 v1(2312.6,348.03)
ALARM: R16.1 U4.77 | length 1405.2
  Top w5.91: R16.1@470.94,1102.24 501.85,1102.24 v1@501.73,1102.36 ; v1(1608.27,1253.94) 1608.27,1253.55 U4.77@1659.64,1202.18
  Top w9.84: v1@1608.27,1255.91 v1(1608.27,1253.94) U4.77@1641.73,1220.47
  Top w11.81: R16.1@474.41,1098.43 v1@494.09,1098.43 ; R16.1@476.38,1106.3 v1@496.06,1106.3
  MidLayer2 w5.91: v1(497.8,1102.36) 521.42,1078.74 677.17,1078.74 875.98,1277.56 1480.31,1277.56 1503.94,1253.94 v1(1608.27,1253.94)
BATT_CURRENT_SENS: R27.1 U4.26 | length 2054
  Top w5.91: U4.26@1784.61,436.26 1816.93,403.94 v1(1816.93,377.95) ; R27.1@2438.5,1149.72 2464.45,1149.72 v1(2464.57,1149.61)
  Top w9.84: R27.1@2440.94,1147.64 v1@2460.63,1147.64 ; R27.1@2444.88,1153.54 v1@2466.54,1153.54
  Top w11.81: U4.26@1805.12,415.35 1814.96,405.51 v1@1814.96,375.98
  MidLayer1 w5.91: v1(2594.49,419.29) 2641.73,466.54 2641.73,806.43 2698.16,862.86 2698.16,1137.14 v1(2710.63,1149.61)
  MidLayer2 w5.91: v1(1816.93,377.95) 2253.45,377.95 2304.04,327.36 2321.16,327.36 2321.55,327.76 2520.67,327.76 2594.49,401.57 v1(2594.49,419.29) ; v1(2464.57,1149.61) v1(2710.63,1149.61)
BATT_CURRENT_SENS_PROT: J15.3 R27.2 R28.1 | length 770.9
  Top w5.91: v1(2482.28,1297.24) 2482.28,1175.2 2501.5,1155.98 R27.2@2501.5,1149.72 ; R28.1@2501.46,1080 R27.2@2501.5,1149.72
  Top w9.84: v1@2488.19,1293.31 2488.19,1175.2 2501.97,1161.42 R27.2@2501.97,1157.48 ; R28.1@2498.03,1084.65 R27.2@2498.03,1153.54 ; R28.1@2503.94,1080.71 R27.2@2503.94,1147.64
  Bottom w5.91: v1@2484.25,1295.28 2484.25,1297.24 2484.25,1334.65 2499.21,1349.61 J15.3@2540,1349.61
  Bottom w11.81: v1@2478.35,1295.28 2478.35,1338.58 2498.03,1358.27 J15.3@2523.62,1358.27 ; v1@2484.25,1295.28 2484.25,1326.77 2501.97,1344.49 J15.3@2515.75,1344.49
BATT_VOLTAGE_SENS: R29.1 U4.25 | length 2044.5
  Top w5.91: U4.25@1673.26,436.26 1693.69,456.69 v1(1710.63,456.69) ; 2584.92,1167.6 R29.1@2584.92,1151.34 2584.92,1177.44 2590.55,1183.07 v1(2594.48,1183.07)
  Top w9.84: U4.25@1692.91,456.69 v1@1704.72,456.69 ; U4.25@1694.88,452.76 v1@1706.69,452.76 ; R29.1@2580.71,1157.48 2580.71,1177.17 v1@2592.52,1188.98 ; R29.1@2586.61,1151.57 v1@2586.61,1181.1 ; R29.1@2594.49,1153.54 v1(2594.48,1183.07)
  MidLayer1 w5.91: v1(2549.21,393.7) 2549.21,484.25 2521.65,511.81 2521.65,703.05 2684.06,865.45 2684.06,1176.18 2687.01,1179.13 v1(2688.98,1179.13)
  MidLayer2 w5.91: v1(1710.63,456.69) 1711.61,457.68 2015.74,457.68 2044.29,457.68 2092.52,409.45 2490.16,409.45 2505.91,393.7 v1(2549.21,393.7) ; v1(2594.48,1183.07) 2665.35,1183.07 v1@2685.04,1183.07
  Bottom w5.91: v1@2592.52,1183.07 v1(2594.48,1183.07)
BATT_VOLTAGE_SENS_PROT: J15.4 R29.2 R31.1 | length 735.2
  Top w5.91: R31.1@2649.33,1080.95 2649.33,1226.1 2665.35,1242.13 v1(2665.35,1303.15)
  Top w9.84: R29.2@2651.57,1153.54 2651.57,1224.41 2671.26,1244.09 v1@2671.26,1307.09
  Bottom w5.91: J15.4@2540,1300 v1@2662.2,1300
  Bottom w11.81: J15.4@2553.15,1297.24 v1@2667.32,1297.24 ; J15.4@2562.99,1305.12 v1@2671.26,1305.12
CAN1_RX: U1.4 U4.81 | length 1258.6
  Top w5.91: U4.81@1603.78,1146.32 1603.78,1142.58 1672.39,1073.97 v1@1675.2,1071.16 ; U1.4@1623,108.65 1639.13,92.52 1665.35,92.52 v1(1671.26,98.43)
  Top w9.84: U4.81@1624.02,1127.95 1624.02,1125.98 v1@1675.2,1074.8
  Top w11.81: U1.4@1624.02,94.49 v1@1669.29,94.49
  MidLayer1 w5.91: v1(1671.26,98.43) 1672.39,99.56 1672.39,734.25 1672.39,1045.27 v1@1672.39,1074.8
  other v1: 1670.42,1074.09
CAN1_TX: U1.1 U4.82 | length 1421.3
  Top w5.91: U1.1@1545.61,108.65 1545.61,140.1 1562.99,157.48 1641.73,157.48 1651.72,147.49 v1(1651.72,123.28) ; U4.82@1590.34,1132.88 1643.7,1079.52 v1@1643.7,1072.83
  Top w9.84: U4.82@1610.24,1114.17 1610.24,1112.99 v1@1641.73,1081.49
  Top w11.81: U1.1@1545.28,124.02 1545.28,143.7 1559.06,157.48 1635.83,157.48 1637.8,157.48 1649.61,145.67 v1@1649.61,122.05
  MidLayer1 w5.91: v1(1639.76,1072.83) 1637.8,1072.83 1657.48,1053.15 1657.48,1035.43 1657.48,129.04 v1(1651.72,123.28)
CAN2_RX: R78.1 U4.51 | length 1805.1
  Top w5.91: R78.1@1386.16,205.72 1402.55,205.72 v1(1415.35,192.91) ; v1(1809.06,864.17) 1814.96,858.27 2095.27,858.27 U4.51@2118.71,881.71
  Top w9.84: v1@1809.06,858.27 2090.55,858.27 2095.27,858.27 U4.51@2101.17,864.17
  Top w11.81: R78.1@1389.76,210.63 1401.57,210.63 v1@1415.35,196.85 ; R78.1@1395.67,202.76 1401.57,202.76 v1@1413.39,190.94
  MidLayer1 w5.91: v1(1807.09,192.91) 1810.16,195.98 1810.16,282.36 1767.72,324.8 1767.72,608.27 1810.16,650.71 v1@1810.16,865.04
  MidLayer2 w5.91: v1(1415.35,192.91) v1(1807.09,192.91)
CAN2_TX: R78.2 U4.92 | length 1096.2
  Top w5.91: R78.2@1386.16,237.21 v1(1467.51,237.21) ; U4.92@1450.52,993.06 1476.38,967.2 1476.38,919.31 1466.54,909.47 v1@1472.44,909.45
  Top w9.84: U4.92@1468.5,976.38 1478.35,966.54 1478.35,917.32 v1@1472.44,911.42
  Top w11.81: R78.2@1395.67,236.22 v1@1460.63,236.22 ; 1399.61,234.25 v1@1462.6,234.25
  MidLayer1 w5.91: v1(1467.51,237.21) 1486.22,255.92 1486.22,521.65 1511.81,547.24 1511.81,864.47 1484.4,891.88 1472.44,903.84 v1@1472.44,909.45
  Bottom w5.91: v1(1467.51,237.21) v1@1470.47,234.25
  other v1: 1470.47,911.42
CAN_H: J9.2 R75.2 U1.7 | length 357.6
  Top w5.91: R75.2@1553.19,280.28 1562.97,270.49 1562.97,240.18 1571.2,231.94 U1.7@1571.2,201.91
  Top w9.84: R75.2@1549.21,273.62 1549.21,269.68 v1@1564.96,253.94 ; R75.2@1557.09,277.56 1568.9,265.75 U1.7@1568.9,220.47
  Bottom w5.91: v1(1561.02,251.97) 1584.65,275.59 1598.43,275.59 1620.41,253.61 J9.2@1644,253.61
  Bottom w11.81: v1@1562.99,253.94 1582.68,273.62 1600.41,273.62 J9.2@1626,248.03
CAN_L: J9.3 R75.1 U1.6 | length 399.9
  Top w5.91: U1.6@1597,201.91 1597,235.67 v1(1590.78,241.88) 1590.78,254.88 R75.1@1616.18,280.28
  Top w9.84: U1.6@1594.49,220.47 1594.49,273.62 R75.1@1608.27,287.4 ; U1.6@1598.43,224.41 1598.43,269.69 1612.2,283.46 R75.1@1612.2,285.43 ; 1598.43,255.91 1618.11,275.59 R75.1@1618.11,277.56
  Bottom w5.91: v1(1590.78,241.88) v1@1594.48,238.19 ; v1@1596.46,238.19 v1@1594.48,238.19 ; J9.3@1644,204 1603.09,204 1594.48,212.61 v1@1594.48,238.19
  Bottom w11.81: v1@1590.55,244.09 1590.55,218.5 J9.3@1610.24,198.82
ESC-5V: 
FMU-!RESET: C21.2 K2.3 U4.14 U9.4 | length 2653.1
  Top w5.91: K2.3@1079.24,1479.08 1126.72,1479.08 1157.99,1510.35 C21.2@1157.99,1546.42 ; v1(1511.81,507.87) 1494.09,525.59 1494.09,563.32 U4.14@1520.14,589.37 ; v1(2137.8,498.03) 2137.8,466.54 2151.11,453.22 U9.4@2175.89,453.22
  Top w9.84: K2.3@1094.49,1468.5 1120.08,1468.5 1161.42,1509.84 C21.2@1161.42,1545.28 ; K2.3@1094.49,1480.32 1118.11,1480.32 1151.57,1513.78 C21.2@1151.57,1545.28 ; K2.3@1094.49,1488.19 v1@1129.92,1488.19 ; U4.14@1499.68,568.9 1494.09,563.31 1494.09,525.59 1513.78,505.91 v1@1513.78,503.94
  Top w11.81: v1(2137.8,498.03) 2137.8,464.57 2149.61,452.76 U9.4@2173.23,452.76
  MidLayer1 w5.91: v1(1511.81,507.87) 1531.5,527.56 v1(1531.5,1350.39)
  MidLayer2 w5.91: v1@1124.02,1482.28 1399.61,1482.28 1530.51,1351.38 v1(1531.5,1350.39) ; v1(1511.81,507.87) 1519.68,500 2137.8,500 v1(2137.8,498.03)
  other v1: 1120.08,1472.44 1133.86,1492.13
FMU-BOOT0: R23.2 U4.94 | length 317
  Top w5.91: R23.2@1351.1,1104.95 1377.95,1078.09 1377.95,1009.95 U4.94@1422.68,965.22
  Top w9.84: R23.2@1350.39,1104.33 1377.95,1076.77 1377.95,1009.84 U4.94@1407.48,980.32
FMU-CH1: R7.1 U4.45 | length 2767.7
  Top w5.91: R7.1@390.83,1548.38 419.53,1519.68 v1@653.54,1519.68 ; v1(1870.08,809.06) 1941.04,809.06 U4.45@2049.22,700.87
  Top w9.84: v1@1875.98,807.09 1942.91,807.09 2030.71,719.29 U4.45@2030.8,719.29
  Top w11.81: R7.1@389.76,1551.18 389.76,1549.21 419.29,1519.68 v1@653.54,1519.68
  MidLayer1 w5.91: v1@1780.51,1313.98 v1@1781.5,1314.96 ; v1(1781.5,1316.93) 1757.87,1293.31 1757.87,1196.85 1899.61,1055.12 1899.61,962.6 1870.08,933.07 v1(1870.08,809.06)
  MidLayer2 w5.91: v1(655.51,1517.72) 1393.4,1517.72 1590.25,1320.87 1775.59,1320.87 v1@1781.5,1314.96
FMU-CH1-PROT: J1.46 R7.2 | length 200.3
  Top w5.91: J1.46@249.62,1548.38 R7.2@327.83,1548.38
  Top w11.81: J1.46@255.91,1555.12 R7.2@322.83,1555.12 ; J1.46@269.68,1541.34 R7.2@324.8,1541.34
FMU-CH2: R6.1 U4.44 | length 2547.4
  Top w5.91: R6.1@390.83,1448.63 v1@571.05,1448.63 ; v1(1757.87,801.18) 1781.5,801.18 1801.18,781.5 1941.73,781.5 U4.44@2035.79,687.43
  Top w11.81: R6.1@399.61,1446.85 v1@566.93,1446.85
  MidLayer1 w5.91: v1(501.97,942.91) 500,942.91 477.13,965.79 477.13,1351.14 v1(572.83,1446.85)
  MidLayer2 w5.91: v1(501.97,942.91) 588.58,856.3 1305.12,856.3 1363.19,798.23 1754.92,798.23 v1(1757.87,801.18)
  Bottom w5.91: v1@1755.91,799.21 v1(1757.87,801.18)
FMU-CH3: R5.1 U4.42 | length 2567.8
  Top w5.91: R5.1@390.83,1348.88 413.84,1348.88 v1(421.26,1356.3) ; v1(1732.28,755.91) 1739.17,749.02 1914.37,749.02 2004.24,659.15 U4.42@2007.51,659.15
  Top w9.84: v1@1734.25,750 1917.32,750 U4.42@1988.19,679.13
  Top w11.81: R5.1@399.61,1352.36 v1@415.35,1352.36 ; R5.1@401.57,1358.27 v1@423.23,1358.27
  MidLayer1 w5.91: v1(421.26,1356.3) 448.82,1328.74 448.82,828.74 v1(478.35,799.21)
  MidLayer2 w5.91: v1(478.35,799.21) 500,820.87 1181.1,820.87 1212.6,789.37 1242.13,789.37 1275.59,822.83 1297.24,822.83 1364.17,755.91 v1(1732.28,755.91)
FMU-CH4: R4.1 U4.40 | length 2388.2
  Top w5.91: v1(366.14,1250) 389.95,1250 R4.1@390.83,1249.13 ; v1(1885.83,688.98) 1922.53,688.98 U4.40@1979.93,631.57
  Top w9.84: v1(1885.83,688.98) 1923.23,688.98 U4.40@1962.6,649.61
  Top w11.81: v1@370.08,1244.09 R4.1@383.86,1244.09 ; v1@372.05,1253.94 R4.1@381.89,1253.94
  MidLayer1 w5.91: v1(480.32,757.87) 527.56,805.12 527.56,1220.47 v1(500,1248.03)
  MidLayer2 w5.91: v1@368.11,1248.03 v1(500,1248.03) ; v1(480.32,757.87) 527.56,805.12 1168.3,805.12 1234.25,739.17 1630.91,739.17 1677.17,692.91 1885.83,692.91 v1(1885.83,688.98)
FMU-CH5: R3.1 U4.60 | length 2024.2
  Top w5.91: v1(360.24,1149.61) 360.47,1149.37 R3.1@390.83,1149.37 ; v1@1925.2,927.17 1925.2,938.75 U4.60@1993.43,1006.98
  Top w9.84: v1@1921.26,925.2 1921.26,937.01 U4.60@1972.44,988.19
  Top w11.81: v1@360.24,1153.54 R3.1@383.86,1153.54 ; v1@362.2,1147.64 R3.1@383.86,1147.64
  MidLayer1 w5.91: v1(359.25,1002.95) 359.25,1148.62 v1(360.24,1149.61) ; v1@1925.2,927.17 v1@1925.2,933.07
  MidLayer2 w5.91: v1(359.25,1002.95) 1445.87,1002.95 1527.56,921.26 1753.93,921.26 1754.92,920.28 1918.31,920.28 v1@1925.2,927.17
  other v1: 1923.23,929.13
FMU-CH6: R2.1 U4.61 | length 1910.4
  Top w5.91: R2.1@390.83,1049.62 390.83,1048.15 v1(413.39,1025.59) ; v1(1795.28,940.94) 1796.26,941.93 1900.54,941.93 U4.61@1979.51,1020.9
  Top w9.84: v1@1797.24,940.94 1897.64,940.94 U4.61@1958.66,1001.97
  Top w11.81: R2.1@391.73,1043.31 409.45,1025.59 v1@411.42,1025.59 ; R2.1@395.67,1049.21 395.67,1045.28 v1@413.39,1027.56
  MidLayer2 w5.91: v1(413.39,1025.59) 423.23,1015.75 1460.63,1015.75 1534.45,941.93 1759.84,941.93 1794.29,941.93 v1(1795.28,940.94)
FMU-CH6-PROT: J1.31 R2.2 | length 207.9
  Top w5.91: J1.31@248.38,1049.62 R2.2@327.83,1049.62 R2.2@327.45,1050
  Top w11.81: J1.31@271.65,1039.37 311.02,1039.37 ; J1.31@273.62,1057.09 R2.2@316.93,1057.09 ; J1.31@275.59,1049.21 R2.2@320.87,1049.21
FMU-I2C1_SCL: R26.1 R45.2 U4.95 | length 2078.2
  Top w5.91: R26.1@1309.42,1050.64 U4.95@1408.76,951.3 1440.94,919.12 v1(1440.94,909.45) ; v1(1694.88,116.56) 1696.85,118.53 1696.85,122.05 1679.13,139.76 1679.13,283.46 1712.48,316.81 R45.2@1759.96,316.81
  Top w9.84: R26.1@1307.09,1061.02 1307.09,1051.18 1440.94,917.32 v1@1440.94,915.35
  Top w11.81: v1@1696.85,122.05 1692.91,122.05 1679.13,135.83 1679.13,285.43 1708.66,314.96 R45.2@1753.94,314.96
  MidLayer1 w5.91: v1(1440.94,909.45) 1492.13,858.27 1492.13,555.12 1466.54,529.53 1466.54,289.37 1446.84,269.68 1446.84,245.78 1446.84,218.51 v1(1446.85,122.05) v1@1446.85,120.08
  MidLayer2 w5.91: v1(1446.85,122.05) 1503.94,64.96 1688.98,64.96 1696.85,72.83 1696.85,116.14 1696.43,116.56 v1(1694.88,116.56)
FMU-I2C1_SDA: R25.1 R44.2 U4.96 | length 1927.3
  Top w5.91: R25.1@1268.66,1024.34 1307.89,1024.34 U4.96@1394.84,937.38 1415.23,916.99 1415.23,897.76 v1(1433.07,879.92) ; v1(1724.41,108.27) 1722.44,110.24 1722.44,161.18 R44.2@1757.99,196.73
  Top w9.84: R25.1@1259.84,1027.56 1305.12,1027.56 1417.32,915.35 1417.32,899.61 v1@1433.07,883.86
  Top w11.81: v1@1722.44,112.2 1722.44,163.39 R44.2@1759.84,200.79
  MidLayer1 w5.91: v1(1407.48,118.11) 1364.17,161.42 1364.17,466.54 1474.41,576.77 1474.41,838.58 v1(1433.07,879.92)
  MidLayer2 w5.91: v1(1407.48,118.11) 1478.35,47.24 1710.63,47.24 1724.41,61.02 v1(1724.41,108.27)
FMU-I2C2_SCL: R22.1 U4.47 U9.3 | length 702.9
  Top w5.91: U4.47@2077.51,729.15 2179.13,627.53 v1(2179.13,580.71) ; U9.3@2175.89,473.22 2184.92,473.22 2220.47,437.67 v1(2220.47,435.04) ; v1@2181.1,578.74 2197.32,562.52 R22.1@2206.57,562.52
  Top w9.84: U4.47@2094.49,712.6 2177.17,629.92 v1@2177.17,580.71
  Top w11.81: v1@2175.2,582.68 2187.01,582.68 R22.1@2208.66,561.02 ; 2187.01,472.44 2214.57,444.88 v1@2214.57,437.01
  MidLayer1 w5.91: v1(2179.13,580.71) 2179.13,476.38 v1(2220.47,435.04)
FMU-I2C2_SDA: R21.1 U4.48 U9.2 | length 691.2
  Top w5.91: U4.48@2090.94,742.59 2206.57,626.96 R21.1@2206.57,621.57 2236.22,591.93 2236.22,503.94 2224.41,492.13 U9.2@2176.67,492.13
  Top w9.84: U4.48@2108.27,726.38 2208.66,625.98 R21.1@2214.57,625.98
  Top w11.81: U9.2@2185.04,494.09 2224.41,494.09 2236.22,505.91 2236.22,596.46 R21.1@2212.6,620.08
FMU-SWCLK: JX3.4 U4.76 | length 1198.9
  Top w5.91: U4.76@1673.78,1216.32 1712.6,1177.5 v1(1712.6,1149.61)
  Top w9.84: U4.76@1690.94,1200.79 1712.6,1179.13 v1@1712.6,1153.54
  MidLayer1 w5.91: v1(1226.38,814.96) 1200.79,840.55 1200.79,1120.08 v1(1226.38,1145.67)
  MidLayer2 w5.91: v1@1228.35,1147.64 v1@1712.6,1147.64
  Bottom w5.91: v1(1226.38,814.96) 1227.36,815.94 1359.06,815.94 JX3.4@1360,815 ; v1@1710.63,1147.64 v1(1712.6,1149.61)
  Bottom w11.81: v1@1226.38,818.9 JX3.4@1312.99,818.9
FMU-SWDIO: JX3.2 U4.72 | length 1219.4
  Top w5.91: v1(1789.37,1092.52) 1789.37,1138.17 U4.72@1825.81,1174.6
  Top w9.84: v1@1787.4,1094.49 1787.4,1137.8 U4.72@1814.96,1165.35
  MidLayer1 w5.91: v1(1740.16,864.17) 1740.16,948.82 1787.4,996.06 v1@1787.4,1090.55
  MidLayer2 w5.91: v1@1234.25,881.89 v1(1236.22,879.92) 1240.16,875.98 1307.09,875.98 1323.82,859.25 1737.2,859.25 v1@1740.16,862.2
  Bottom w5.91: v1(1236.22,879.92) 1236.22,875.98 1247.2,865 JX3.2@1360,865 JX3.2@1316.1,865
  Bottom w11.81: v1@1238.19,881.89 1238.19,877.95 1250,866.14 JX3.2@1330.71,866.14
FMU-SWO: JX3.6 U4.89 | length 976.4
  Top w5.91: v1(1387.8,1171.26) 1387.8,1139.3 U4.89@1492.28,1034.82
  Top w9.84: v1@1389.76,1171.26 1389.76,1139.76 U4.89@1474.41,1055.12
  MidLayer1 w5.91: v1(1269.68,767.71) 1271.65,769.68 1301.18,769.68 1387.8,856.3 v1(1387.8,1171.26)
  Bottom w5.91: v1(1269.68,767.71) 1271.65,769.68 1276.34,765 JX3.6@1360,765
  Bottom w11.81: v1@1271.65,763.78 JX3.6@1311.02,763.78 ; v1@1271.65,767.72 JX3.6@1314.96,767.72
FMU-UART4_RX: R78.3 U4.24 | length 677.5
  Top w5.91: R78.3@1386.16,268.71 1477.87,268.71 U4.24@1659.34,450.18
  Top w9.84: R78.3@1387.8,269.68 1478.35,269.68 1645.67,437.01 U4.24@1647.64,437.01
FMU-UART4_TX: R78.4 U4.23 | length 625.5
  Top w5.91: R78.4@1386.16,300.21 1390.1,296.26 1477.58,296.26 U4.23@1645.42,464.09
  Top w9.84: R78.4@1393.7,293.31 1474.41,293.31 U4.23@1625.98,444.88
FMU-UART7_RX: R79.1 U4.38 | length 1841.7
  Top w5.91: R79.1@1187.34,276.58 1217.51,276.58 1230.32,263.78 v1(1230.32,200.79) ; U4.38@1951.64,603.29 1997.85,557.09 v1(2005.91,557.09)
  Top w9.84: U4.38@1972.44,582.68 2001.97,553.15 v1@2007.87,553.15
  Top w11.81: R79.1@1188.98,281.5 1212.6,281.5 1232.28,261.81 1232.28,212.6
  MidLayer1 w5.91: v1(2005.91,557.09) 2005.91,472.44 2088.58,389.76 2088.58,246.06 ; v1@2088.58,43.31 v1(2088.58,45.28) 2088.58,246.06 ; 2088.58,234.25 2088.58,246.06
  MidLayer2 w5.91: v1(1230.32,200.79) 1230.32,157.48 1237.2,150.59 1257.87,150.59 1262.5,150.59 1263.48,151.57 1710.63,151.57 1724.41,137.8 1816.93,45.28 v1(2088.58,45.28)
FMU-UART7_TX: R79.2 U4.39 | length 1989.8
  Top w5.91: R79.2@1187.34,308.08 1235.23,308.08 1253.94,289.37 v1(1253.94,171.26) ; U4.39@1965.79,617.43 1998.57,584.65 2015.75,584.65 2039.37,561.02 v1(2039.37,559.06)
  Top w9.84: U4.39@1985.03,599.62 1998.03,586.61 2013.78,586.61 2041.34,559.06 v1@2041.34,555.12
  Top w11.81: R79.2@1192.91,307.09 1236.22,307.09 1253.94,289.37 v1@1253.94,177.17
  MidLayer1 w5.91: v1(2039.37,559.06) 2039.37,476.38 2120.08,395.67 2120.08,250 ; v1(2120.08,66.93) 2120.08,250 ; 2120.08,244.09 2120.08,250
  MidLayer2 w5.91: v1(1253.94,171.26) 1283.46,171.26 1720.47,171.26 1824.8,66.93 v1(2120.08,66.93)
FMU-UART8_RX: R79.3 U4.97 | length 1585.7
  Top w5.91: v1(1080.71,978.35) 1222.44,978.35 ; v1(1108.27,442.91) 1135.83,415.35 1198.82,415.35 1212.6,401.57 1212.6,350.39 1201.78,339.58 R79.3@1187.34,339.58 ; 1204.72,978.35 1222.44,978.35 ; U4.97@1380.92,923.46 1326.04,978.35 1222.44,978.35
  Top w9.84: v1@1082.68,978.35 1326.77,978.35 U4.97@1364.17,940.94
  Top w11.81: v1(1108.27,442.91) 1110.24,442.91 1135.83,417.32 1198.82,417.32 1212.6,403.54 1212.6,350.39 R79.3@1196.85,334.65
  MidLayer1 w5.91: v1(1080.71,978.35) 1085.63,973.43 1085.63,645.67 1085.63,521.65 1085.63,465.55 1087.6,463.58 v1(1108.27,442.91)
  Bottom w5.91: v1@1078.74,980.32 v1(1080.71,978.35)
FMU-UART8_TX: R79.4 U4.98 | length 1441.8
  Top w5.91: v1(1070.87,444.88) 1120.08,395.67 1162.74,395.67 R79.4@1187.34,371.07 ; v1@1071.85,957.68 1089.27,957.68 1092.22,960.63 1315.91,960.63 U4.98@1367,909.54
  Top w9.84: v1@1064.96,954.72 1088.58,954.72 1094.49,960.63 1314.96,960.63 1350.39,925.2 U4.98@1352.36,925.2
  Top w11.81: v1(1070.87,444.88) 1120.08,395.67 1167.32,395.67 1187.01,375.98 R79.4@1187.01,368.11
  MidLayer1 w5.91: v1(1064.96,950.79) 1070.87,956.69 1070.87,923.23 v1(1070.87,444.88)
FMU-USART2_CTS: R76.4 U4.84 | length 264.5
  Top w5.91: R76.4@1544.9,1243.39 1541.88,1240.37 1541.88,1124.77 U4.84@1562.06,1104.6
  Top w9.84: U4.84@1541.34,1125.98 R76.4@1541.34,1242.13
FMU-USART2_RTS: R76.3 U4.85 | length 316.4
  Top w5.91: R76.3@1513.41,1243.39 1513.41,1126.38 U4.85@1548.62,1091.16
  Top w9.84: R76.3@1513.78,1240.16 1513.78,1124.02 U4.85@1537.4,1100.39
FMU-USART2_RX: R76.1 U4.87 | length 386.2
  Top w5.91: R76.1@1450.41,1243.39 1450.79,1243.01 1450.79,1132.43 U4.87@1520.34,1062.88
  Top w9.84: R76.1@1450.79,1236.22 1450.79,1131.89 U4.87@1501.97,1080.71
FMU-USART2_TX: R76.2 U4.86 | length 352.1
  Top w5.91: R76.2@1481.91,1243.39 1481.91,1129.59 U4.86@1534.48,1077.02
  Top w9.84: R76.2@1482.28,1244.09 1482.28,1129.22 U4.86@1517.01,1094.49
FMU-USART3_CTS: R77.2 U4.58 | length 139.2
  Top w5.91: U4.58@2021.27,979.14 2021.27,983.87 2079.73,1042.33 R77.2@2079.73,1094.16
FMU-USART3_RTS: R77.1 U4.59 | length 208.5
  Top w5.91: U4.59@2007.35,993.06 2048.24,1033.95 R77.1@2048.24,1094.16
  Top w9.84: U4.59@2025.59,1011.81 2049.21,1035.43 R77.1@2049.21,1092.52
FMU-USART3_RX: R77.3 U4.56 | length 297.1
  Top w5.91: U4.56@2049.11,951.3 2050.5,951.3 2111.23,1012.03 R77.3@2111.23,1094.16
  Top w9.84: 2072.83,972.44 2110.24,1009.84 R77.3@2110.24,1084.65
FMU-USART3_TX: R77.4 U4.55 | length 350.1
  Top w5.91: U4.55@2063.03,937.38 2142.73,1017.08 R77.4@2142.73,1094.16
  Top w9.84: U4.55@2082.68,956.69 2141.73,1015.75 R77.4@2141.73,1092.52